# EAGLE board BMS Test Board rev1 r2 (EAGLE 9.2.2), part 1 of 4
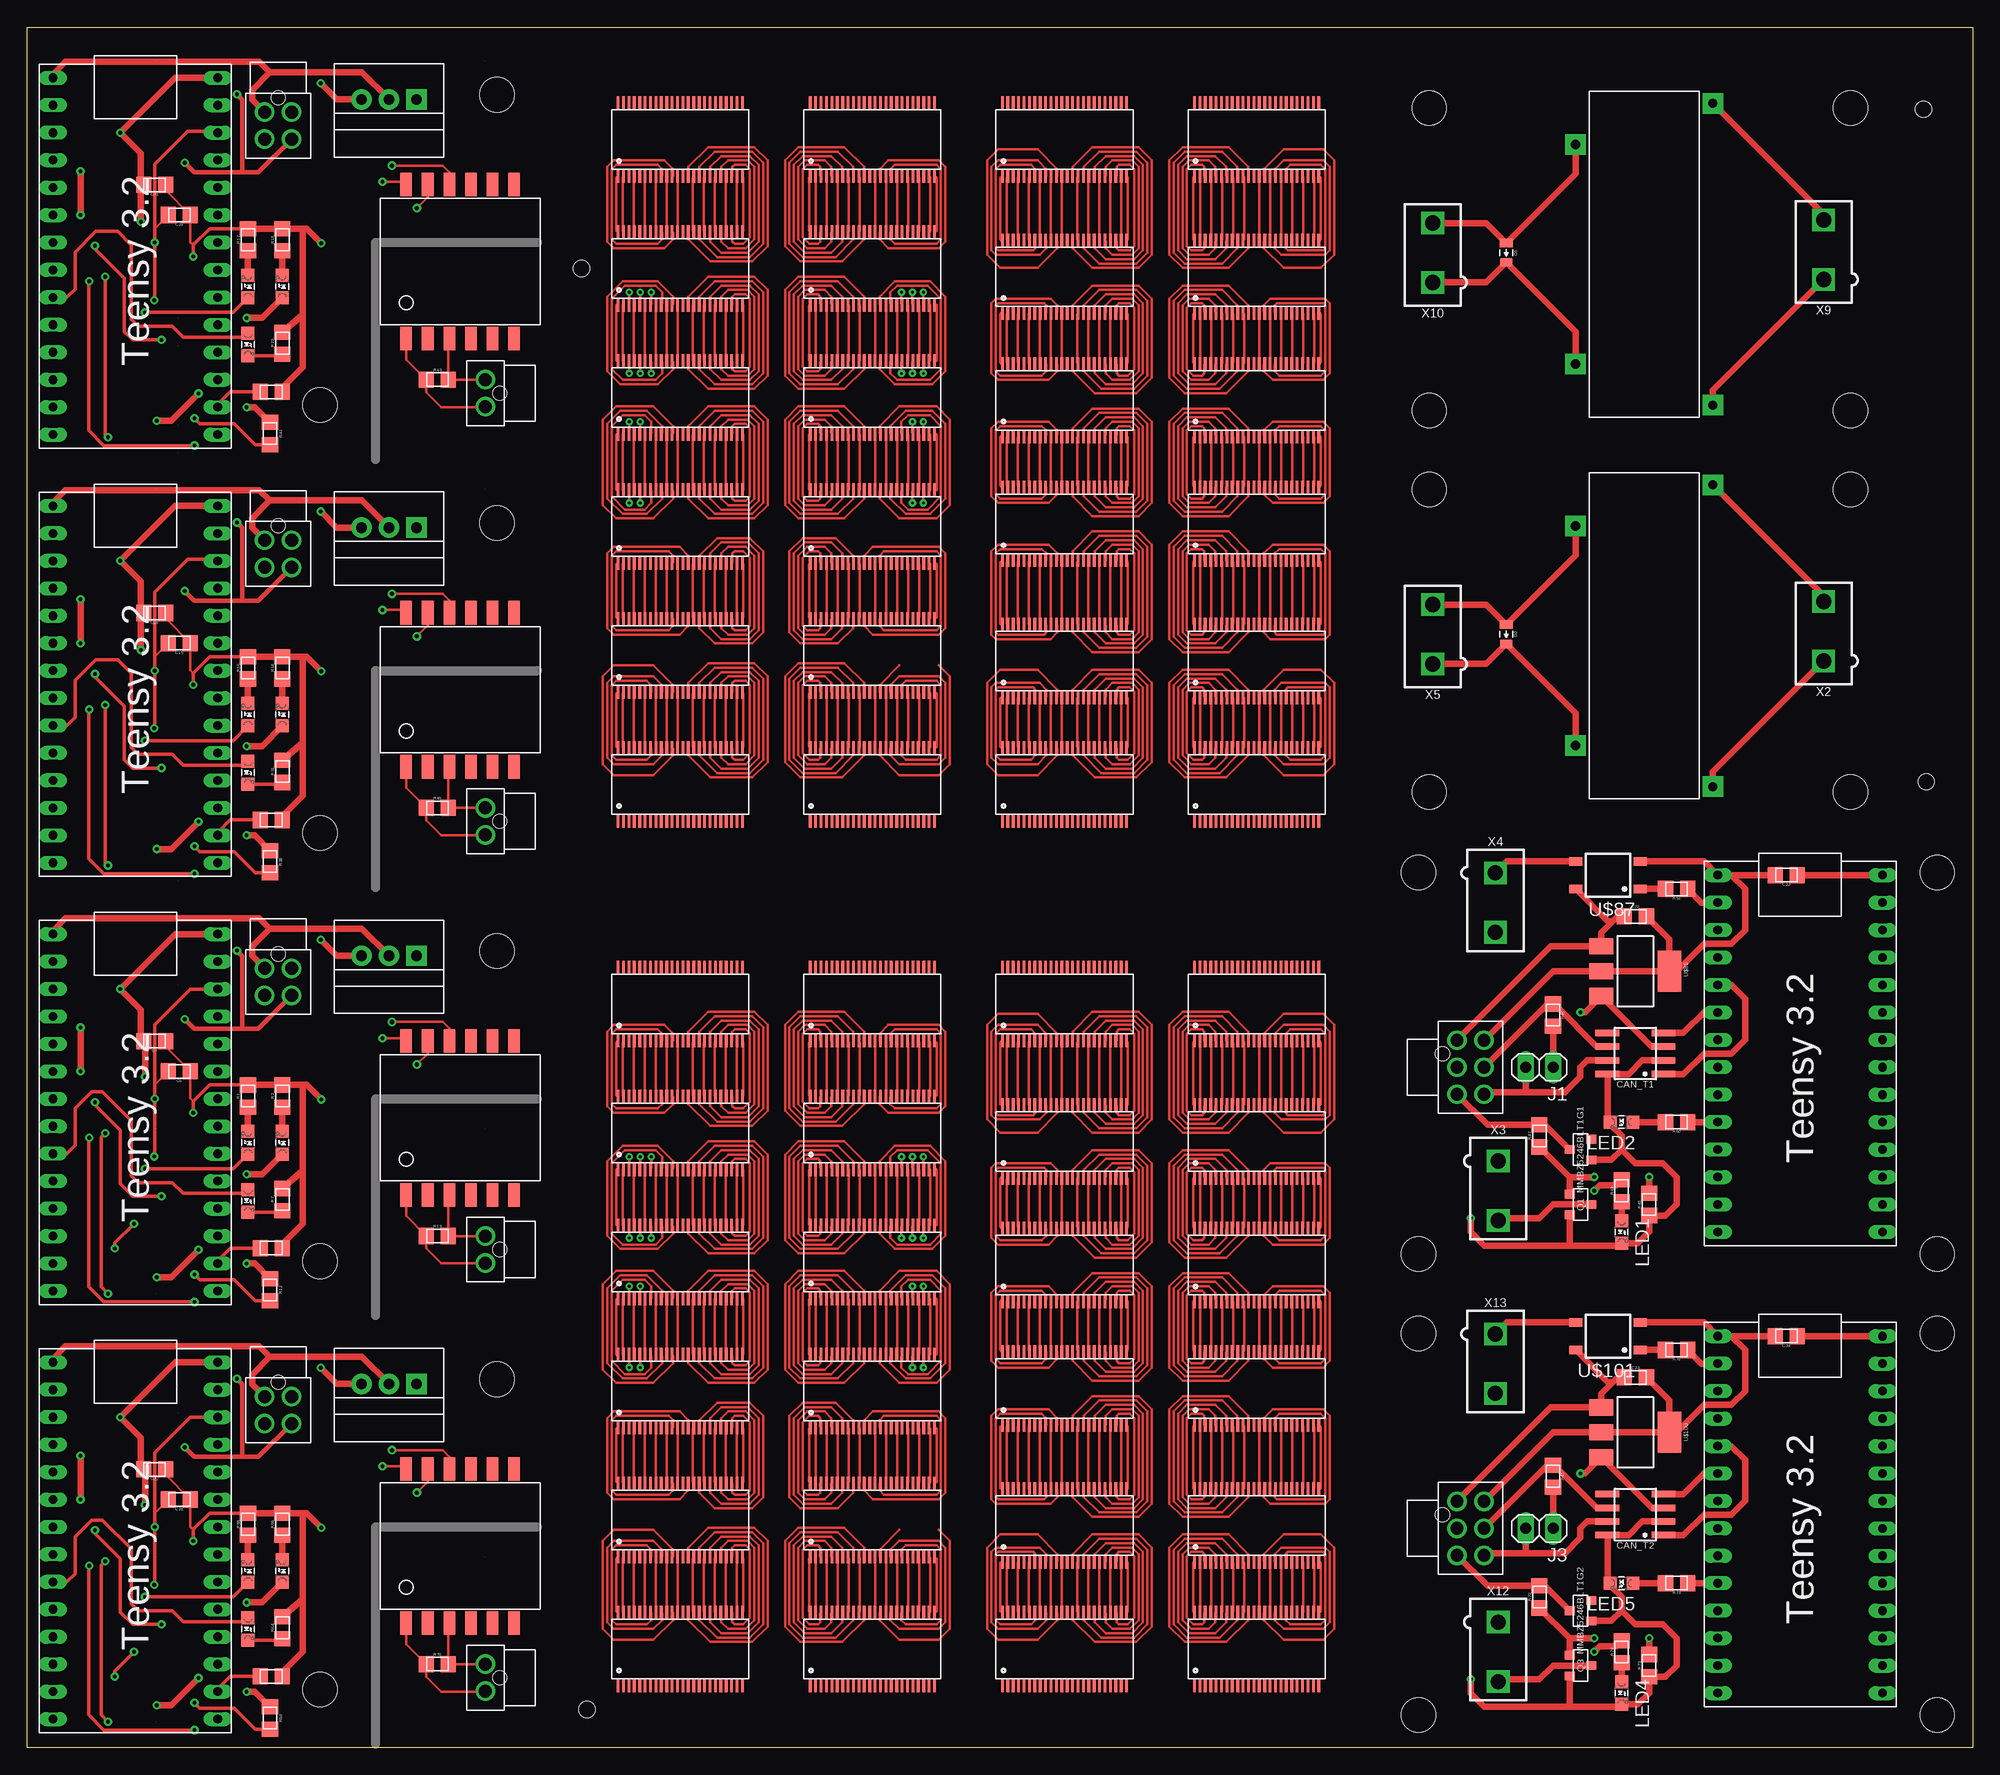
[diagram p0: board, top side]
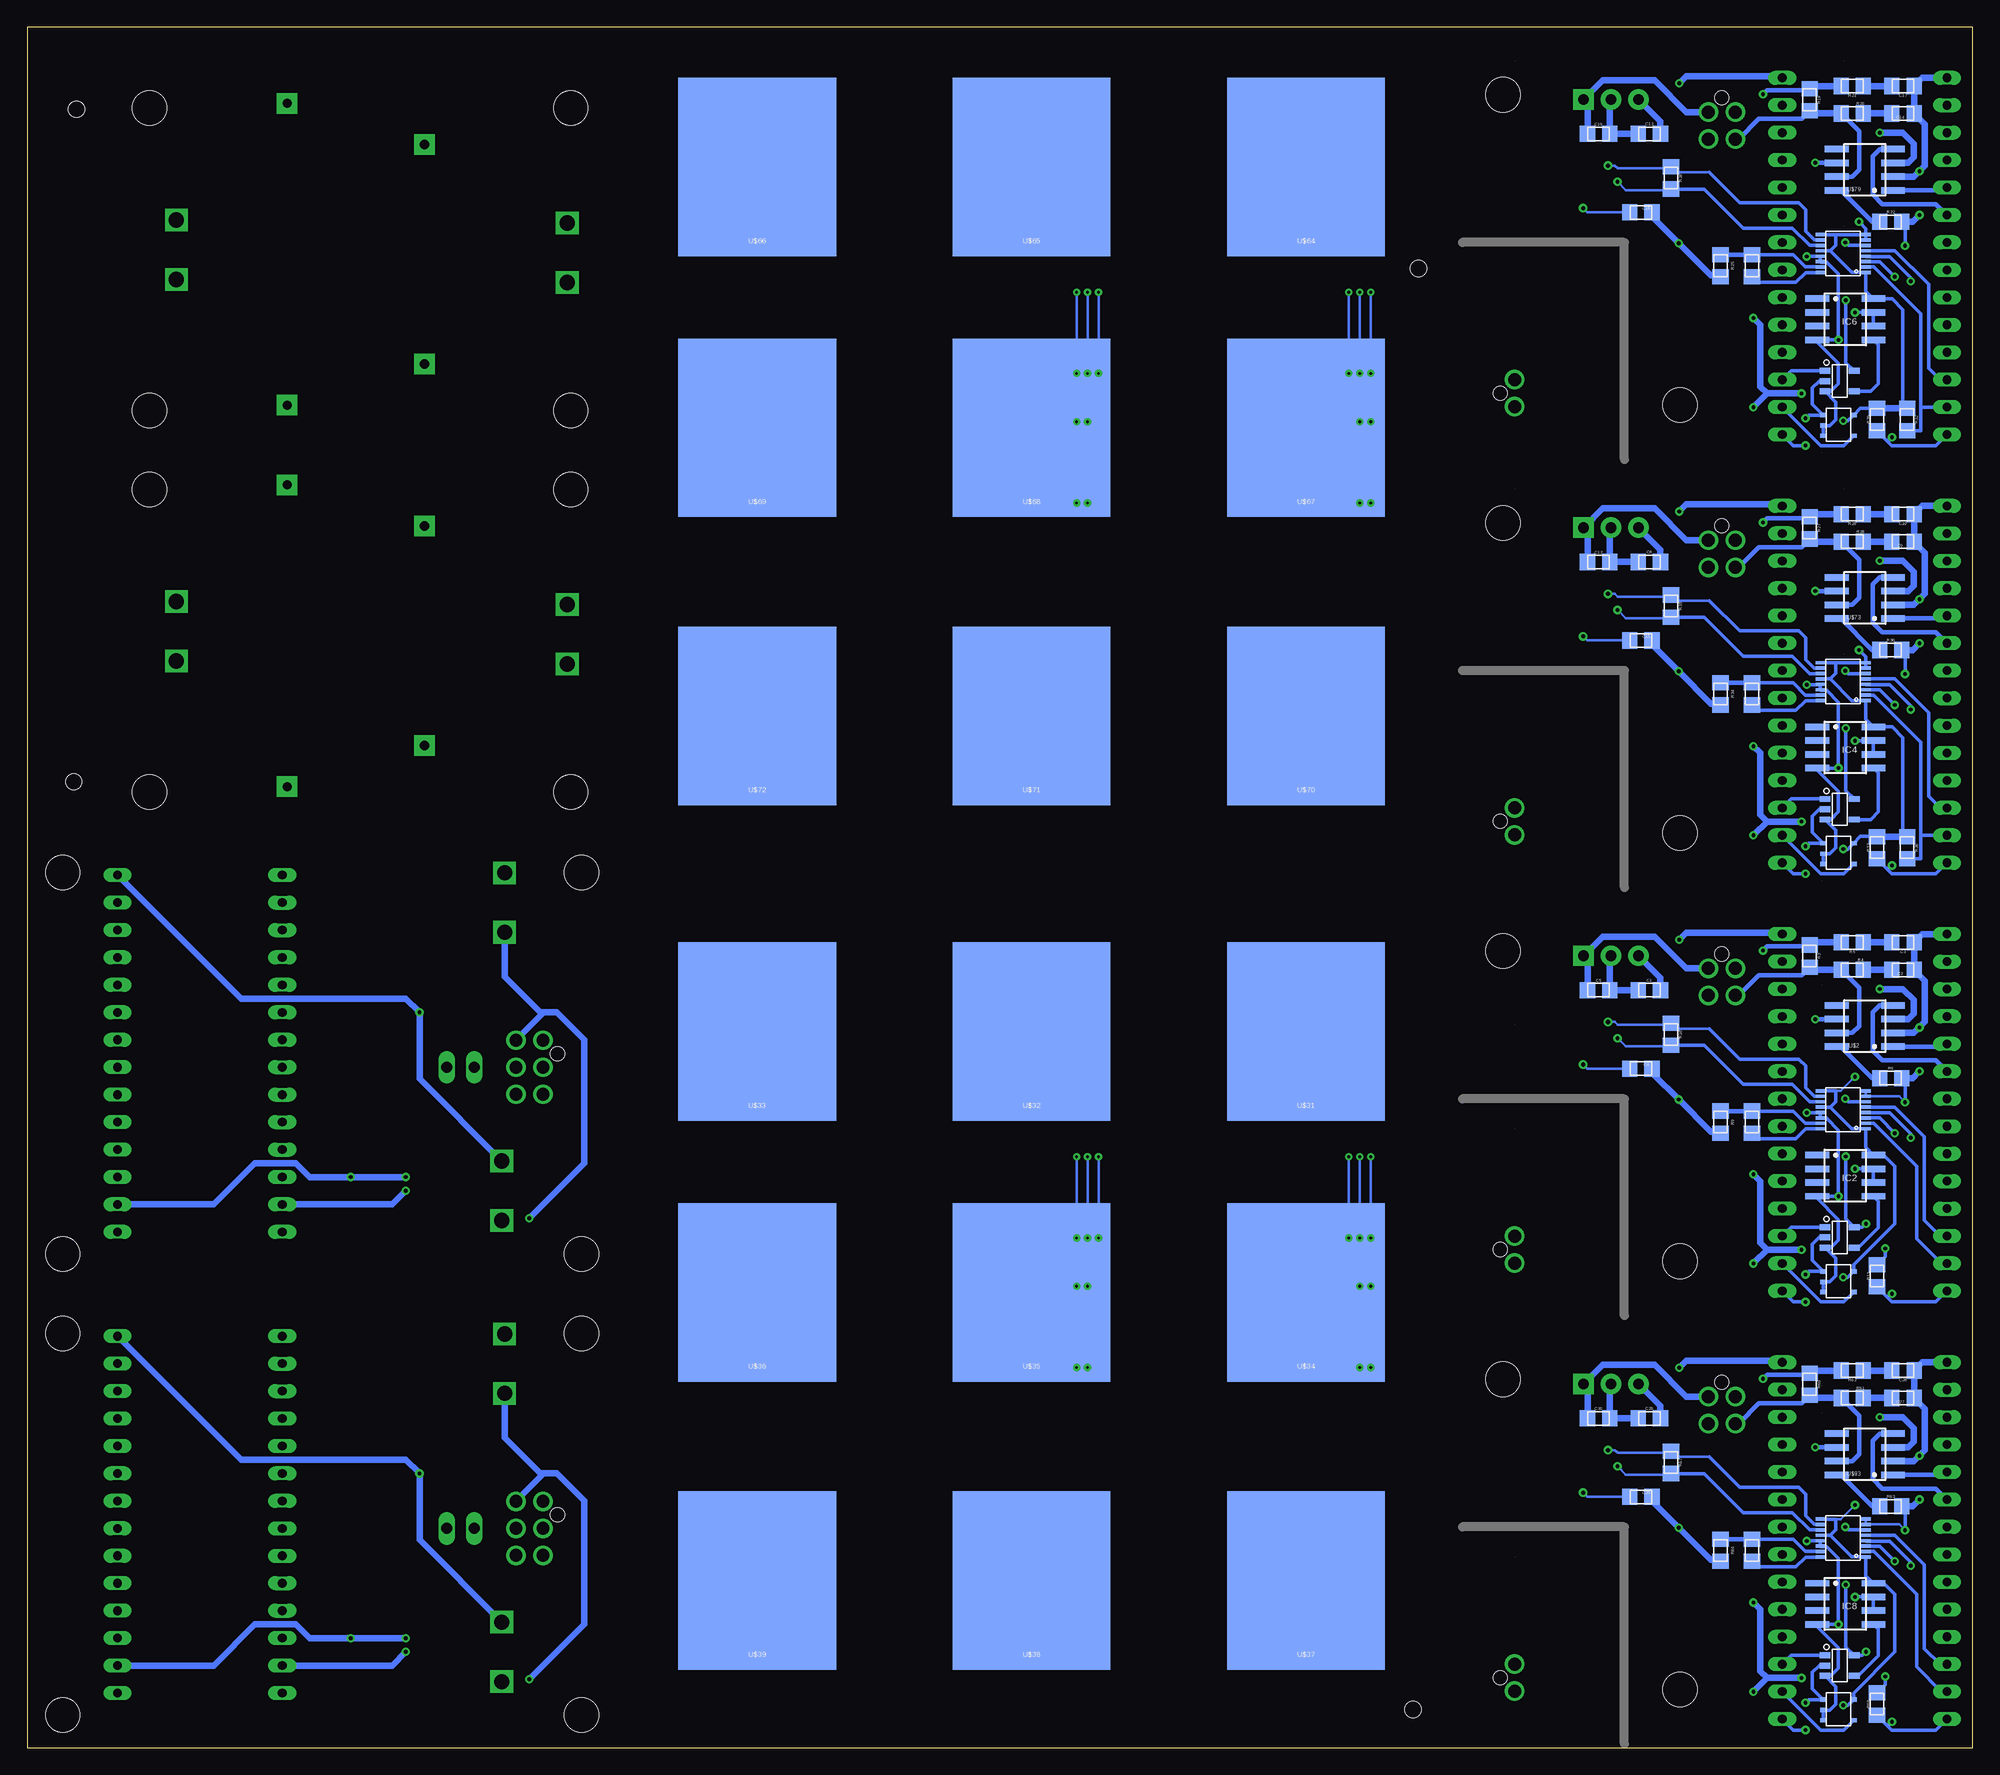
[diagram p1: board, bottom side, seen from below]

Size 180.09 x 159.26 mm. Coordinates in mm from the lower left corner, seen from the top.
Outline: 0,159.26 180.09,159.26 180.09,0 0,0 0,159.26
Copper layers (1*16): Top 0.035mm / dielectric 1.5mm / Bottom 0.035mm
Design rules "default": minimum track width 6mil, minimum drill 0.35mm, track to track 6mil, track to pad 6mil, pad to pad 6mil, via to via 6mil, smd to smd 6mil, copper to edge 40mil, drill to drill 6mil, minimum pad ring 10mil, minimum via ring 8mil, stop-mask expansion 4mil, vias tented up to drill 0mil, thermal gap 10mil
Net classes: 2 ISO_SPI: clearance 8.5 mm to class 0, clearance 8.5 mm to class 1
Holes 3.17 mm at 129.76,116.47 129.76,88.47 168.77,88.47 168.77,116.47 129.76,151.78 129.76,123.78 168.77,123.78 168.77,151.78 128.78,38.35 128.78,3.05 176.78,3.05 176.78,38.35 128.78,81.03 128.78,45.72 176.78,45.72 176.78,81.03
Holes 3.2 mm at 27.1,5.41 43.48,34.11 27.1,45.03 43.48,73.74 27.1,84.66 43.48,113.36 27.1,124.28 43.48,152.98
Holes 1.5 mm at 175.51,151.64 175.77,89.41 51.31,136.91 51.82,3.56

## Footprints (pad centres in the part's own frame; a part is rotated, then mirrored left to right if it is on the bottom)
LED-805 = smd 1.2 x 1.2: A 0,-1.05; C 0,1.05
0805 = smd 1.4 x 1.5: 1 -1.025,0; 2 1.025,0
SOIC-08 = smd 0.6 x 2.2: 1 -1.905,-2.6; 2 -0.635,-2.6; 3 0.635,-2.6; 4 1.905,-2.6; 5 1.905,2.6; 6 0.635,2.6; 7 -0.635,2.6; 8 -1.905,2.6
0805_D = smd 0.8 x 1.2: A -0.9,0; C 0.9,0
OKI-78SR = drill 1 pad 1.88 square: 1 -2.54,0 | drill 1 pad 1.88: 2 0,0; 3 2.54,0
NANO-FIT_VERTICAL-2 = drill 1.2: P$1 -1.25,0; P$2 1.25,0 | hole 1.3: 0,-1.34
1X02 = drill 1.016 long: 1 -1.27,0; 2 1.27,0
SOT23 = smd 0.8 x 0.9: 1 -0.95,-1; 2 0.95,-1; 3 0,1
NANO-FIT_VERTICAL-4 = drill 1.2: P$1 -1.25,0; P$2 1.25,0; P$3 -1.25,2.5; P$4 1.25,2.5 | hole 1.3: 0,-1.34
LTC6804 = smd 0.25 x 1.25: 1 -5.75,-3.37; 2 -5.25,-3.37; 3 -4.75,-3.37; 4 -4.25,-3.37; 5 -3.75,-3.37; 6 -3.25,-3.37; 7 -2.75,-3.37; 8 -2.25,-3.37; 9 -1.75,-3.37; 10 -1.25,-3.37; 11 -0.75,-3.37; 12 -0.25,-3.37; 13 0.25,-3.37; 14 0.75,-3.37; 15 1.25,-3.37; 16 1.75,-3.37; 17 2.25,-3.37; 18 2.75,-3.37; 19 3.25,-3.37; 20 3.75,-3.37; 21 4.25,-3.37; 22 4.75,-3.37; 23 5.25,-3.37; 24 5.75,-3.37; 25 5.75,3.38; 26 5.25,3.38; 27 4.75,3.38; 28 4.25,3.38; 29 3.75,3.38; 30 3.25,3.38; 31 2.75,3.38; 32 2.25,3.38; 33 1.75,3.38; 34 1.25,3.38; 35 0.75,3.38; 36 0.25,3.38; 37 -0.25,3.38; 38 -0.75,3.38; 39 -1.25,3.38; 40 -1.75,3.38; 41 -2.25,3.38; 42 -2.75,3.38; 43 -3.25,3.38; 44 -3.75,3.38; 45 -4.25,3.38; 46 -4.75,3.38; 47 -5.25,3.38; 48 -5.75,3.38
MSOP-16 = smd 0.305 x 0.889: 1 -0.1,-0.5; 2 0.4,-0.5; 3 0.9,-0.5; 4 1.4,-0.5; 5 1.9,-0.5; 6 2.4,-0.5; 7 2.9,-0.5; 8 3.4,-0.5; 9 3.4,3.7; 10 2.9,3.7; 11 2.4,3.7; 12 1.9,3.7; 13 1.4,3.7; 14 0.9,3.7; 15 0.4,3.7; 16 -0.1,3.7
TEENSY_3.2_SIMPLE = drill 0.8 long: 3.3V 16.51,29.21; A0 16.51,3.81; A1 16.51,6.35; A2 16.51,8.89; A3 16.51,11.43; A4 16.51,13.97; A5 16.51,16.51; A6 16.51,19.05; A7 16.51,21.59; A8 16.51,24.13; A9 16.51,26.67; AGND 16.51,31.75; D0(RX1) 1.27,31.75; D1(TX1) 1.27,29.21; D2 1.27,26.67; D3(CANTX) 1.27,24.13; D4(CANRX) 1.27,21.59; D5 1.27,19.05; D6 1.27,16.51; D7(RX3) 1.27,13.97; D8(TX3) 1.27,11.43; D9(RX2) 1.27,8.89; D10(TX2) 1.27,6.35; D11 1.27,3.81; D12 1.27,1.27; D13 16.51,1.27; GND 1.27,34.29; VIN 16.51,34.29
SOT23-5 = smd 0.61 x 0.406: EN -2.794,0; GND -2.794,0.94; VCC 0,1.905; WDI 0,0; WDO -2.794,1.905
HM2102NLT = smd 1.067 x 2.184: P$1 0,0; P$2 2,0; P$3 4,0; P$4 6,0; P$5 8,0; P$6 10,0; P$7 10,14.25; P$8 8,14.25; P$9 6,14.25; P$10 4,14.25; P$11 2,14.25; P$12 0,14.25
SOT-23-5 = smd 1 x 0.55: 1 -1.35,0.95; 2 -1.35,0; 3 -1.35,-0.95; 4 1.35,-0.95; 5 1.35,0.95
KEYSTONE5222 = smd 14.605 x 16.51: P$1 0,0
SOT223 = smd 1.5 x 2.235: 1 -2.3,-3.15; 2 0,-3.15; 3 2.3,-3.15 | smd 3.8 x 2.2: 4 0,3.15
SOP04 = smd 0.8 x 1.2: 1 -1.27,-3; 2 1.27,-3; 3 1.27,3; 4 -1.27,3
KT12-1A-40L-THT = drill 0.85 pad 1.9 square: C1 4.95,11.45; C2 25.25,11.45; S1 1.13,-1.25; S2 29.07,-1.25
NANO-FIT_VERTICAL-6 = drill 1.2: P$1 -2.5,0; P$2 0,0; P$3 2.5,0; P$4 -2.5,2.5; P$5 0,2.5; P$6 2.5,2.5 | hole 1.3: -1.25,-1.34
MINIFIT_5566-2 = drill 1.4 square: 1 0,-2.75; 2 0,2.75

## Placement (x,y rotation side)
BMS-OK  GREEN  [LED-805]  20.45,95.63 0 top
BMS-OK1  GREEN  [LED-805]  20.45,56.01 0 top
BMS-OK2  GREEN  [LED-805]  20.45,135.25 0 top
BMS-OK3  GREEN  [LED-805]  20.45,16.38 0 top
C1  10uF  [0805]  29.95,70.13 180 bottom
C2  560pF  [0805]  6.48,72.01 180 bottom
C3  560pF  [0805]  6.48,74.55 180 bottom
C4  27pF  [0805]  30.73,62.87 0 bottom
C5  10uF  [0805]  34.65,70.13 0 bottom
C6  0.1uF  [0805]  14.1,62.61 180 top
C7  0.1uF  [0805]  11.81,65.41 180 top
C8  10uF  [0805]  29.95,109.75 180 bottom
C9  560pF  [0805]  6.48,111.63 180 bottom
C10  560pF  [0805]  6.48,114.17 180 bottom
C11  27pF  [0805]  30.73,102.49 0 bottom
C12  10uF  [0805]  34.65,109.75 0 bottom
C13  10uF  [0805]  29.95,149.38 180 bottom
C14  560pF  [0805]  6.48,151.26 180 bottom
C15  0.1uF  [0805]  14.1,102.23 180 top
C16  0.1uF  [0805]  11.81,105.03 180 top
C17  560pF  [0805]  6.48,153.8 180 bottom
C18  27pF  [0805]  30.73,142.11 0 bottom
C19  10uF  [0805]  34.65,149.38 0 bottom
C20  0.1uF  [0805]  14.1,141.86 180 top
C21  0.1uF  [0805]  11.81,144.65 180 top
C22  0.22uF  [0805]  148.84,76.96 0 top
C23  0.22uF  [0805]  162.81,80.77 180 top
C26  10uF  [0805]  29.95,30.51 180 bottom
C27  560pF  [0805]  6.48,32.38 180 bottom
C28  560pF  [0805]  6.48,34.92 180 bottom
C29  27pF  [0805]  30.73,23.24 0 bottom
C30  10uF  [0805]  34.65,30.51 0 bottom
C31  0.1uF  [0805]  14.1,22.99 180 top
C32  0.1uF  [0805]  11.81,25.78 180 top
C33  0.22uF  [0805]  148.84,34.29 0 top
C34  0.22uF  [0805]  162.81,38.1 180 top
CAN_T1  MCP2551  [SOIC-08]  148.84,64.26 90 top
CAN_T2  MCP2551  [SOIC-08]  148.84,21.59 90 top
D1  DIODE0805  [0805_D]  136.9,138.37 270 top
D2  DIODE0805  [0805_D]  136.9,103.06 270 top
IC1  OKI-78SR-5  [OKI-78SR]  33.5,73.3 180 top
IC2  NE5532SOIC  [SOIC-08]  11.81,52.96 270 bottom
IC3  OKI-78SR-5  [OKI-78SR]  33.5,112.93 180 top
IC4  NE5532SOIC  [SOIC-08]  11.81,92.58 270 bottom
IC5  OKI-78SR-5  [OKI-78SR]  33.5,152.55 180 top
IC6  NE5532SOIC  [SOIC-08]  11.81,132.21 270 bottom
IC7  OKI-78SR-5  [OKI-78SR]  33.5,33.68 180 top
IC8  NE5532SOIC  [SOIC-08]  11.81,13.34 270 bottom
ISO_SPI  ISO_SPI  [NANO-FIT_VERTICAL-2]  42.42,85.75 90 top
ISO_SPI1  ISO_SPI  [NANO-FIT_VERTICAL-2]  42.42,46.12 90 top
ISO_SPI2  ISO_SPI  [NANO-FIT_VERTICAL-2]  42.42,125.37 90 top
ISO_SPI3  ISO_SPI  [NANO-FIT_VERTICAL-2]  42.42,6.5 90 top
J1  JUMPER.1  [1X02]  139.95,62.99 180 top
J3  JUMPER.1  [1X02]  139.95,20.32 180 top
LED1  [LED-805]  147.57,47.75 180 top
LED2  [LED-805]  147.57,57.91 90 top
LED4  [LED-805]  147.57,5.08 180 top
LED5  [LED-805]  147.57,15.24 90 top
MMBZ5246BLT1G1  DIODE_ZENER  [SOT23]  143.76,55.37 90 top
MMBZ5246BLT1G2  DIODE_ZENER  [SOT23]  143.76,12.7 90 top
ON-LED  PURPLE  [LED-805]  23.62,95.63 0 top
ON-LED1  PURPLE  [LED-805]  23.62,56.01 0 top
ON-LED2  PURPLE  [LED-805]  23.62,135.25 0 top
ON-LED3  PURPLE  [LED-805]  23.62,16.38 0 top
POWER  POWER  [NANO-FIT_VERTICAL-4]  23.24,111.76 180 top
POWER1  POWER  [NANO-FIT_VERTICAL-4]  23.24,72.14 180 top
POWER2  POWER  [NANO-FIT_VERTICAL-4]  23.24,151.38 180 top
POWER3  POWER  [NANO-FIT_VERTICAL-4]  23.24,32.51 180 top
Q1  [SOT23]  143.76,50.29 270 top
Q3  [SOT23]  143.76,7.62 270 top
R1  820  [0805]  20.45,60.33 90 top
R2  270  [0805]  23.62,60.33 90 top
R3  120  [0805]  15.11,73.28 270 bottom
R4  100  [0805]  11.18,72.01 180 bottom
R5  100  [0805]  11.18,74.55 180 bottom
R6  1k  [0805]  7.62,61.98 180 bottom
R7  430  [0805]  23.62,50.75 90 top
R8  1k  [0805]  20.45,57.91 90 bottom
R9  1k  [0805]  23.37,57.91 270 bottom
R10  120  [0805]  27.94,66.04 270 bottom
R11  2k  [0805]  8.89,43.69 270 bottom
R12  430  [0805]  22.48,42.39 270 top
R13  100  [0805]  37.97,47.37 0 top
R14  10k  [0805]  22.61,46.25 0 top
R15  820  [0805]  20.45,99.95 90 top
R16  270  [0805]  23.62,99.95 90 top
R17  820  [0805]  20.45,139.57 90 top
R18  270  [0805]  23.62,139.57 90 top
R19  120  [0805]  15.11,152.53 270 bottom
R20  100  [0805]  11.18,151.26 180 bottom
R21  100  [0805]  11.18,153.8 180 bottom
R22  1k  [0805]  7.62,141.22 180 bottom
R23  430  [0805]  23.62,130 90 top
R24  1k  [0805]  20.45,137.16 90 bottom
R25  1k  [0805]  23.37,137.16 270 bottom
R26  120  [0805]  27.94,145.29 270 bottom
R27  120  [0805]  15.11,112.9 270 bottom
R28  100  [0805]  11.18,111.63 180 bottom
R29  100  [0805]  11.18,114.17 180 bottom
R30  1k  [0805]  7.62,101.6 180 bottom
R31  430  [0805]  23.62,90.37 90 top
R32  2k  [0805]  6.1,122.94 270 bottom
R33  1k  [0805]  20.45,97.54 90 bottom
R34  1k  [0805]  23.37,97.54 270 bottom
R35  120  [0805]  27.94,105.66 270 bottom
R36  2k  [0805]  6.1,83.31 270 bottom
R37  2k  [0805]  8.89,83.31 270 bottom
R38  430  [0805]  22.48,82.02 270 top
R39  2k  [0805]  8.89,122.94 270 bottom
R40  100  [0805]  37.97,87 0 top
R41  430  [0805]  22.48,121.64 270 top
R42  10k  [0805]  22.61,85.88 0 top
R43  100  [0805]  37.97,126.62 0 top
R44  10k  [0805]  22.61,125.5 0 top
R45  120  [0805]  141.22,25.15 270 top
R46  120  [0805]  141.22,67.82 270 top
R47  20k  [0805]  139.95,56.64 90 top
R48  10k  [0805]  150.11,50.29 90 top
R49  1.2k  [0805]  147.57,51.56 90 top
R50  1.2k  [0805]  152.65,57.91 180 top
R51  330  [0805]  152.65,79.5 180 top
R58  820  [0805]  20.45,20.7 90 top
R59  270  [0805]  23.62,20.7 90 top
R60  120  [0805]  15.11,33.66 270 bottom
R61  100  [0805]  11.18,32.38 180 bottom
R62  100  [0805]  11.18,34.92 180 bottom
R63  1k  [0805]  7.62,22.35 180 bottom
R64  430  [0805]  23.62,11.13 90 top
R65  1k  [0805]  20.45,18.29 90 bottom
R66  1k  [0805]  23.37,18.29 270 bottom
R67  120  [0805]  27.94,26.42 270 bottom
R68  2k  [0805]  8.89,4.06 270 bottom
R69  430  [0805]  22.48,2.77 270 top
R70  100  [0805]  37.97,7.75 0 top
R71  10k  [0805]  22.61,6.63 0 top
R72  20k  [0805]  139.95,13.97 90 top
R73  10k  [0805]  150.11,7.62 90 top
R74  1.2k  [0805]  147.57,8.89 90 top
R75  1.2k  [0805]  152.65,15.24 180 top
R76  330  [0805]  152.65,36.83 180 top
TEENSY  BLUE  [LED-805]  20.45,90.25 180 top
TEENSY1  BLUE  [LED-805]  20.45,50.62 180 top
TEENSY2  BLUE  [LED-805]  20.45,129.87 180 top
TEENSY3  BLUE  [LED-805]  20.45,11 180 top
U$1  LTC6804-2  [LTC6804]  60.45,9.14 0 top
U$2  MCP2551  [SOIC-08]  10.01,66.8 90 bottom
U$3  LTC6820  [MSOP-16]  10.41,57.4 90 bottom
U$4  LTC6804-2  [LTC6804]  60.45,21.08 0 top
U$5  LTC6804-2  [LTC6804]  60.45,33.02 0 top
U$6  LTC6804-2  [LTC6804]  60.45,44.96 0 top
U$7  TEENSY_3.2_SIMPLE  [TEENSY_3.2_SIMPLE]  1.14,41.02 0 top
U$8  STWD100  [SOT23-5]  11.05,42.19 0 bottom
U$9  HM2102NLT  [HM2102NLT]  35.09,51.18 0 top
U$10  SN74LVC1G08  [SOT-23-5]  12.34,47.24 0 bottom
U$11  LTC6804-2  [LTC6804]  60.45,56.9 0 top
U$12  LTC6804-2  [LTC6804]  60.45,68.83 0 top
U$13  LTC6804-2  [LTC6804]  78.23,9.14 0 top
U$14  LTC6804-2  [LTC6804]  78.23,21.08 0 top
U$15  LTC6804-2  [LTC6804]  78.23,33.02 0 top
U$16  LTC6804-2  [LTC6804]  78.23,44.96 0 top
U$17  LTC6804-2  [LTC6804]  78.23,56.9 0 top
U$18  LTC6804-2  [LTC6804]  78.23,68.83 0 top
U$19  LTC6804-2  [LTC6804]  96.01,9.14 0 top
U$20  LTC6804-2  [LTC6804]  96.01,20.57 0 top
U$21  LTC6804-2  [LTC6804]  96.01,33.27 0 top
U$22  LTC6804-2  [LTC6804]  96.01,44.7 0 top
U$23  LTC6804-2  [LTC6804]  96.01,56.13 0 top
U$24  LTC6804-2  [LTC6804]  96.01,68.83 0 top
U$25  LTC6804-2  [LTC6804]  113.79,9.14 0 top
U$26  LTC6804-2  [LTC6804]  113.79,20.57 0 top
U$27  LTC6804-2  [LTC6804]  113.79,33.27 0 top
U$28  LTC6804-2  [LTC6804]  113.79,44.7 0 top
U$29  LTC6804-2  [LTC6804]  113.79,56.13 0 top
U$30  LTC6804-2  [LTC6804]  113.79,68.83 0 top
U$31  BATTERY_SPRING_KEYSTONE5222  [KEYSTONE5222]  61.72,66.29 0 bottom
U$32  BATTERY_SPRING_KEYSTONE5222  [KEYSTONE5222]  87.12,66.29 0 bottom
U$33  BATTERY_SPRING_KEYSTONE5222  [KEYSTONE5222]  112.52,66.29 0 bottom
U$34  BATTERY_SPRING_KEYSTONE5222  [KEYSTONE5222]  61.72,42.16 0 bottom
U$35  BATTERY_SPRING_KEYSTONE5222  [KEYSTONE5222]  87.12,42.16 0 bottom
U$36  BATTERY_SPRING_KEYSTONE5222  [KEYSTONE5222]  112.52,42.16 0 bottom
U$37  BATTERY_SPRING_KEYSTONE5222  [KEYSTONE5222]  61.72,15.49 0 bottom
U$38  BATTERY_SPRING_KEYSTONE5222  [KEYSTONE5222]  87.12,15.49 0 bottom
U$39  BATTERY_SPRING_KEYSTONE5222  [KEYSTONE5222]  112.52,15.49 0 bottom
U$40  LTC6804-2  [LTC6804]  60.45,89.15 0 top
U$41  LTC6804-2  [LTC6804]  60.45,101.09 0 top
U$42  LTC6804-2  [LTC6804]  60.45,113.03 0 top
U$43  LTC6804-2  [LTC6804]  60.45,124.97 0 top
U$44  LTC6804-2  [LTC6804]  60.45,136.91 0 top
U$45  LTC6804-2  [LTC6804]  60.45,148.84 0 top
U$46  LTC6804-2  [LTC6804]  78.23,89.15 0 top
U$47  LTC6804-2  [LTC6804]  78.23,101.09 0 top
U$48  LTC6804-2  [LTC6804]  78.23,113.03 0 top
U$49  LTC6804-2  [LTC6804]  78.23,124.97 0 top
U$50  LTC6804-2  [LTC6804]  78.23,136.91 0 top
U$51  LTC6804-2  [LTC6804]  78.23,148.84 0 top
U$52  LTC6804-2  [LTC6804]  96.01,89.15 0 top
U$53  LTC6804-2  [LTC6804]  96.01,100.58 0 top
U$54  LTC6804-2  [LTC6804]  96.01,113.28 0 top
U$55  LTC6804-2  [LTC6804]  96.01,124.71 0 top
U$56  LTC6804-2  [LTC6804]  96.01,136.14 0 top
U$57  LTC6804-2  [LTC6804]  96.01,148.84 0 top
U$58  LTC6804-2  [LTC6804]  113.79,89.15 0 top
U$59  LTC6804-2  [LTC6804]  113.79,100.58 0 top
U$60  LTC6804-2  [LTC6804]  113.79,113.28 0 top
U$61  LTC6804-2  [LTC6804]  113.79,124.71 0 top
U$62  LTC6804-2  [LTC6804]  113.79,136.14 0 top
U$63  LTC6804-2  [LTC6804]  113.79,148.84 0 top
U$64  BATTERY_SPRING_KEYSTONE5222  [KEYSTONE5222]  61.72,146.3 0 bottom
U$65  BATTERY_SPRING_KEYSTONE5222  [KEYSTONE5222]  87.12,146.3 0 bottom
U$66  BATTERY_SPRING_KEYSTONE5222  [KEYSTONE5222]  112.52,146.3 0 bottom
U$67  BATTERY_SPRING_KEYSTONE5222  [KEYSTONE5222]  61.72,122.17 0 bottom
U$68  BATTERY_SPRING_KEYSTONE5222  [KEYSTONE5222]  87.12,122.17 0 bottom
U$69  BATTERY_SPRING_KEYSTONE5222  [KEYSTONE5222]  112.52,122.17 0 bottom
U$70  BATTERY_SPRING_KEYSTONE5222  [KEYSTONE5222]  61.72,95.5 0 bottom
U$71  BATTERY_SPRING_KEYSTONE5222  [KEYSTONE5222]  87.12,95.5 0 bottom
U$72  BATTERY_SPRING_KEYSTONE5222  [KEYSTONE5222]  112.52,95.5 0 bottom
U$73  MCP2551  [SOIC-08]  10.01,106.43 90 bottom
U$74  LTC6820  [MSOP-16]  10.41,97.03 90 bottom
U$75  TEENSY_3.2_SIMPLE  [TEENSY_3.2_SIMPLE]  1.14,80.64 0 top
U$76  STWD100  [SOT23-5]  11.05,81.81 0 bottom
U$77  HM2102NLT  [HM2102NLT]  35.09,90.81 0 top
U$78  SN74LVC1G08  [SOT-23-5]  12.34,86.87 0 bottom
U$79  MCP2551  [SOIC-08]  10.01,146.05 90 bottom
U$80  LTC6820  [MSOP-16]  10.41,136.65 90 bottom
U$81  TEENSY_3.2_SIMPLE  [TEENSY_3.2_SIMPLE]  1.14,120.27 0 top
U$82  STWD100  [SOT23-5]  11.05,121.44 0 bottom
U$83  HM2102NLT  [HM2102NLT]  35.09,130.43 0 top
U$84  SN74LVC1G08  [SOT-23-5]  12.34,126.49 0 bottom
U$85  TEENSY_3.2_SIMPLE  [TEENSY_3.2_SIMPLE]  155.19,46.48 0 top
U$86  [SOT223]  148.84,71.88 270 top
U$87  CPC1002N  [SOP04]  146.3,80.77 90 top
U$88  KT12-1A-40L-THT  [KT12-1A-40L-THT]  154.75,87.82 90 top
U$92  KT12-1A-40L-THT  [KT12-1A-40L-THT]  154.75,123.13 90 top
U$93  MCP2551  [SOIC-08]  10.01,27.18 90 bottom
U$94  LTC6820  [MSOP-16]  10.41,17.78 90 bottom
U$95  TEENSY_3.2_SIMPLE  [TEENSY_3.2_SIMPLE]  1.14,1.4 0 top
U$96  STWD100  [SOT23-5]  11.05,2.57 0 bottom
U$97  HM2102NLT  [HM2102NLT]  35.09,11.56 0 top
U$98  SN74LVC1G08  [SOT-23-5]  12.34,7.62 0 bottom
U$99  TEENSY_3.2_SIMPLE  [TEENSY_3.2_SIMPLE]  155.19,3.81 0 top
U$100  [SOT223]  148.84,29.21 270 top
U$101  CPC1002N  [SOP04]  146.3,38.1 90 top
X1  CONNECTOR-6NANO-FIT_VERTICAL-6  [NANO-FIT_VERTICAL-6]  132.33,62.99 270 top
X2  CONNECTOR-2  [MINIFIT_5566-2]  166.27,103.34 0 top
X3  CONNECTOR-2  [MINIFIT_5566-2]  136.14,51.56 180 top
X4  CONNECTOR-2  [MINIFIT_5566-2]  135.89,78.23 180 top
X5  CONNECTOR-2  [MINIFIT_5566-2]  130.09,103.06 0 top
X9  CONNECTOR-2  [MINIFIT_5566-2]  166.27,138.65 0 top
X10  CONNECTOR-2  [MINIFIT_5566-2]  130.09,138.37 0 top
X11  CONNECTOR-6NANO-FIT_VERTICAL-6  [NANO-FIT_VERTICAL-6]  132.33,20.32 270 top
X12  CONNECTOR-2  [MINIFIT_5566-2]  136.14,8.89 180 top
X13  CONNECTOR-2  [MINIFIT_5566-2]  135.89,35.56 180 top

## Library data of the parts
BMS-OK BMS-OK1-BMS-OK3 C1-C23 C26-C34 CAN_T1 CAN_T2 D1 D2 IC1-IC8 ISO_SPI ISO_SPI1-ISO_SPI3 J1 J3 LED1 LED2 LED4 LED5 MMBZ5246BLT1G1 MMBZ5246BLT1G2 ON-LED ON-LED1-ON-LED3 POWER POWER1-POWER3 Q1 Q3 R1-R51 R58-R76 TEENSY TEENSY1-TEENSY3 U$1-U$88 U$92-U$101 X1 X11 = HyTechDevices
X2-X5 X9 X10 X12 X13 = HyTechDevices; OC_FARNELL: 1822072; OC_NEWARK: unknown

## Nets
5V2: C34.1 CAN_T2.3 U$99.VIN U$100.3 X12.1
5V4: C23.1 CAN_T1.3 U$85.VIN U$86.3 X3.1
12V1: D2.C U$88.C1 X5.1
12V2: C22.1 U$86.1 U$87.4 X1.P$1
12V3: D1.C U$92.C1 X10.1
12V4: C33.1 U$100.1 U$101.4 X11.P$1
+3V1: C6.2 R11.1 U$3.6 U$7.3.3V U$10.5
+3V2: C20.2 U$80.6 U$81.3.3V U$84.5
+3V3: C15.2 U$74.6 U$75.3.3V U$78.5
+3V4: C31.2 R68.1 U$94.6 U$95.3.3V U$98.5
+5V: C8.1 C16.2 IC3.3 IC4.8 ON-LED.A R36.1 R37.1 R38.1 U$73.3 U$74.1 U$74.7 U$74.8 U$74.9 U$74.12 U$75.VIN U$76.VCC
+5V1: C1.1 C7.2 IC1.3 IC2.8 ON-LED1.A R12.1 U$2.3 U$3.1 U$3.9 U$3.12 U$7.VIN U$8.VCC
+5V2: C13.1 C21.2 IC5.3 IC6.8 ON-LED2.A R32.1 R39.1 R41.1 U$79.3 U$80.1 U$80.7 U$80.8 U$80.9 U$80.12 U$81.VIN U$82.VCC
+5V3: C26.1 C32.2 IC7.3 IC8.8 ON-LED3.A R69.1 U$93.3 U$94.1 U$94.9 U$94.12 U$95.VIN U$96.VCC
+12V: C12.1 IC3.1 POWER.P$1
+12V1: C5.1 IC1.1 POWER1.P$1
+12V2: C19.1 IC5.1 POWER2.P$1
+12V3: C30.1 IC7.1 POWER3.P$1
BMS_OK: IC4.5 U$78.4
BMS_OK1: IC2.5 U$10.4
BMS_OK2: IC6.5 U$84.4
BMS_OK3: IC8.5 U$98.4
CANH: POWER.P$4 R27.2 R28.2 U$73.7
CANH1: POWER1.P$4 R3.2 R4.2 U$2.7
CANH2: POWER2.P$4 R19.2 R20.2 U$79.7
CANH3: CAN_T1.7 J1.2 X1.P$6
CANH5: POWER3.P$4 R60.2 R61.2 U$93.7
CANH6: CAN_T2.7 J3.2 X11.P$6
CANL: POWER.P$3 R27.1 R29.2 U$73.6
CANL1: POWER1.P$3 R3.1 R5.2 U$2.6
CANL2: POWER2.P$3 R19.1 R21.2 U$79.6
CANL3: CAN_T1.6 R46.1 X1.P$5
CANL5: POWER3.P$3 R60.1 R62.2 U$93.6
CANL6: CAN_T2.6 R45.1 X11.P$5
CANRX1: CAN_T1.4 U$85.D4(CANRX)
CANRX2: CAN_T2.4 U$99.D4(CANRX)
CANTX1: CAN_T1.1 U$85.D3(CANTX)
CANTX2: CAN_T2.1 U$99.D3(CANTX)
CHARGE_ENABLE1: MMBZ5246BLT1G1.3 R47.2 X1.P$3
CHARGE_ENABLE2: MMBZ5246BLT1G2.3 R72.2 X11.P$3
CHRG_C1: R51.1 U$85.D0(RX1)
CHRG_C2: R76.1 U$99.D0(RX1)
CS_LTC1: U$3.5 U$7.D10(TX2)
CS_LTC2: U$80.5 U$81.D10(TX2)
CS_LTC3: U$94.5 U$95.D10(TX2)
CS_LTC6820: U$74.5 U$75.D10(TX2)
CS_MCP3208_3.3V: U$75.D9(RX2)
CS_MCP3208_3.3V1: U$7.D9(RX2)
CS_MCP3208_3.3V2: U$81.D9(RX2)
CS_MCP3208_3.3V3: U$95.D9(RX2)
GND: C8.2 C9.1 C10.1 C11.2 C12.2 C15.1 C16.1 IC3.2 IC4.4 POWER.P$2 R15.2 R16.2 R30.1 R31.2 R34.2 R42.2 U$73.2 U$74.13 U$74.14 U$75.GND U$76.EN U$76.GND U$78.3
GND1: C1.2 C2.1 C3.1 C4.2 C5.2 C6.1 C7.1 IC1.2 IC2.4 POWER1.P$2 R1.2 R2.2 R6.1 R7.2 R9.2 R14.2 U$2.2 U$3.7 U$3.8 U$3.13 U$3.14 U$7.GND U$8.EN U$8.GND U$10.3
GND2: C13.2 C14.1 C17.1 C18.2 C19.2 C20.1 C21.1 IC5.2 IC6.4 POWER2.P$2 R17.2 R18.2 R22.1 R23.2 R25.2 R44.2 U$79.2 U$80.13 U$80.14 U$81.GND U$82.EN U$82.GND U$84.3
GND3: C22.2 C23.2 CAN_T1.2 CAN_T1.8 LED1.C LED2.C MMBZ5246BLT1G1.1 Q1.2 R48.1 U$85.GND U$86.2 U$86.4 U$87.2 X1.P$4 X4.2
GND4: D2.A U$88.C2 X5.2
GND6: D1.A U$92.C2 X10.2
GND7: C26.2 C27.1 C28.1 C29.2 C30.2 C31.1 C32.1 IC7.2 IC8.4 POWER3.P$2 R58.2 R59.2 R63.1 R64.2 R66.2 R71.2 U$93.2 U$94.7 U$94.8 U$94.13 U$94.14 U$95.GND U$96.EN U$96.GND U$98.3
GND8: C33.2 C34.2 CAN_T2.2 CAN_T2.8 LED4.C LED5.C MMBZ5246BLT1G2.1 Q3.2 R73.1 U$99.GND U$100.2 U$100.4 U$101.2 X11.P$4 X13.2
IM: R35.1 U$74.10 U$77.P$10
IM1: R10.1 U$3.10 U$9.P$10
IM2: R26.1 U$80.10 U$83.P$10
IM3: R67.1 U$94.10 U$97.P$10
IP: R35.2 U$74.11 U$77.P$12
IP1: R10.2 U$3.11 U$9.P$12
IP2: R26.2 U$80.11 U$83.P$12
IP3: R67.2 U$94.11 U$97.P$12
ISOSPI-M [ISO_SPI]: ISO_SPI.P$2 R40.2 U$77.P$3
ISOSPI-M1 [ISO_SPI]: ISO_SPI1.P$2 R13.2 U$9.P$3
ISOSPI-M2 [ISO_SPI]: ISO_SPI2.P$2 R43.2 U$83.P$3
ISOSPI-M3 [ISO_SPI]: ISO_SPI3.P$2 R70.2 U$97.P$3
ISOSPI-P [ISO_SPI]: ISO_SPI.P$1 R40.1 U$77.P$1
ISOSPI-P1 [ISO_SPI]: ISO_SPI1.P$1 R13.1 U$9.P$1
ISOSPI-P2 [ISO_SPI]: ISO_SPI2.P$1 R43.1 U$83.P$1
ISOSPI-P3 [ISO_SPI]: ISO_SPI3.P$1 R70.1 U$97.P$1
MISO: R37.2 U$74.3 U$75.D12
MISO1: R11.2 U$3.3 U$7.D12
MISO2: R39.2 U$80.3 U$81.D12
MISO3: R68.2 U$94.3 U$95.D12
MOSI_TEENSY: R36.2 U$74.2 U$75.D11
MOSI_TEENSY1: U$3.2 U$7.D11
MOSI_TEENSY2: R32.2 U$80.2 U$81.D11
MOSI_TEENSY3: U$94.2 U$95.D11
N$1: U$1.48 U$4.1
N$2: U$1.47 U$4.2
N$4: U$1.46 U$4.3
N$5: U$1.45 U$4.4
N$6: U$1.44 U$4.5
N$7: U$1.43 U$4.6
N$8: U$1.42 U$4.7
N$9: U$1.41 U$4.8
N$10: U$1.40 U$4.9
N$11: U$1.39 U$4.10
N$12: U$1.38 U$4.11
N$13: U$1.37 U$4.12
N$14: U$1.36 U$4.13
N$15: U$1.35 U$4.14
N$16: U$1.34 U$4.15
N$17: U$1.33 U$4.16
N$18: U$1.32 U$4.17
N$19: U$1.31 U$4.18
N$20: U$1.30 U$4.19
N$21: U$1.29 U$4.20
N$22: U$1.28 U$4.21
N$23: U$1.27 U$4.22
N$24: U$1.26 U$4.23
N$25: BMS-OK1.A IC2.6 IC2.7
N$26: BMS-OK1.C R1.1
N$27: ON-LED1.C R2.1
N$28: U$2.1 U$7.D3(CANTX)
N$29: R6.2 U$2.8
N$30: U$1.25 U$4.24
N$31: C2.2 R4.1
N$32: C3.2 R5.1
N$33: U$4.48 U$5.1
N$34: U$4.47 U$5.2
N$35: R7.1 TEENSY1.C
N$36: R8.1 U$3.16
N$37: R8.2 R9.1 U$3.15
N$38: C4.1 U$9.P$11
N$39: U$4.46 U$5.3
N$40: U$2.4 U$7.D4(CANRX)
N$41: U$4.45 U$5.4
N$42: U$4.44 U$5.5
N$43: TEENSY1.A U$7.D7(RX3)
N$44: R12.2 U$8.WDO U$10.2
N$45: U$4.43 U$5.6
N$46: U$4.42 U$5.7
N$47: U$4.41 U$5.8
N$48: U$4.40 U$5.9
N$49: U$4.39 U$5.10
N$50: U$7.A1 U$10.1
N$51: U$4.38 U$5.11
N$52: U$4.37 U$5.12
N$53: U$4.36 U$5.13
N$54: U$4.35 U$5.14
N$55: U$4.34 U$5.15
N$56: U$4.33 U$5.16
N$57: U$4.32 U$5.17
N$58: U$4.31 U$5.18
N$59: U$4.30 U$5.19
N$60: U$4.29 U$5.20
N$61: U$4.28 U$5.21
N$62: U$4.27 U$5.22
N$63: U$4.26 U$5.23
N$64: U$4.25 U$5.24
N$65: U$5.48 U$6.1
N$66: U$5.47 U$6.2
N$67: U$5.46 U$6.3
N$68: U$5.45 U$6.4
N$69: U$5.44 U$6.5
N$70: U$5.43 U$6.6
N$71: U$5.42 U$6.7
N$72: U$5.41 U$6.8
N$73: U$5.40 U$6.9
N$74: U$5.39 U$6.10
N$75: U$5.38 U$6.11
N$76: U$5.37 U$6.12
N$77: U$5.36 U$6.13
N$78: U$5.35 U$6.14
N$79: U$5.34 U$6.15
N$80: U$5.33 U$6.16
N$81: U$5.32 U$6.17
N$82: U$5.31 U$6.18
N$83: U$5.30 U$6.19
N$84: U$5.29 U$6.20
N$85: U$5.28 U$6.21
N$86: U$5.27 U$6.22
N$87: U$5.26 U$6.23
N$88: U$5.25 U$6.24
N$89: U$6.48 U$11.1
N$90: U$6.47 U$11.2
N$91: U$6.46 U$11.3
N$92: U$6.45 U$11.4
N$93: U$6.44 U$11.5
N$94: U$6.43 U$11.6
N$95: U$6.42 U$11.7
N$96: U$6.41 U$11.8
N$97: U$6.40 U$11.9
N$98: U$6.39 U$11.10
N$99: U$6.38 U$11.11
N$100: U$6.37 U$11.12
N$101: U$6.36 U$11.13
N$102: U$6.35 U$11.14
N$103: U$6.34 U$11.15
N$104: U$6.33 U$11.16
N$105: U$6.32 U$11.17
N$106: U$6.31 U$11.18
N$107: U$6.30 U$11.19
N$108: U$6.29 U$11.20
N$109: U$6.28 U$11.21
N$110: U$6.27 U$11.22
N$111: U$6.26 U$11.23
N$112: U$6.25 U$11.24
N$113: U$11.48 U$12.1
N$114: U$11.47 U$12.2
N$115: U$11.46 U$12.3
N$116: U$11.45 U$12.4
N$117: U$11.44 U$12.5
N$118: U$11.43 U$12.6
N$119: U$11.42 U$12.7
N$120: U$11.41 U$12.8
N$121: U$11.40 U$12.9
N$122: U$11.39 U$12.10
N$123: U$11.38 U$12.11
N$124: U$11.37 U$12.12
N$125: U$11.36 U$12.13
N$126: U$11.35 U$12.14
N$127: U$11.34 U$12.15
N$128: U$11.33 U$12.16
N$129: U$11.32 U$12.17
N$130: U$11.31 U$12.18
N$131: U$11.30 U$12.19
N$132: U$11.29 U$12.20
N$133: U$11.28 U$12.21
N$134: U$11.27 U$12.22
N$135: U$11.26 U$12.23
N$136: U$11.25 U$12.24
N$137: U$13.25 U$14.24
N$138: U$13.26 U$14.23
N$139: U$13.27 U$14.22
N$140: U$13.28 U$14.21
N$141: U$13.29 U$14.20
N$142: U$13.30 U$14.19
N$143: U$13.31 U$14.18
N$144: U$13.32 U$14.17
N$145: U$13.33 U$14.16
N$146: U$13.34 U$14.15
N$147: U$13.35 U$14.14
N$148: U$13.36 U$14.13
N$149: U$13.37 U$14.12
N$150: U$13.38 U$14.11
N$151: U$13.39 U$14.10
N$152: U$13.40 U$14.9
N$153: U$13.41 U$14.8
N$154: U$13.42 U$14.7
N$155: U$13.43 U$14.6
N$156: U$13.44 U$14.5
N$157: U$13.45 U$14.4
N$158: U$13.46 U$14.3
N$159: U$13.47 U$14.2
N$160: U$13.48 U$14.1
N$161: U$14.25 U$15.24
N$162: U$14.26 U$15.23
N$163: U$14.27 U$15.22
N$164: U$14.28 U$15.21
N$165: U$14.29 U$15.20
N$166: U$14.30 U$15.19
N$167: U$14.31 U$15.18
N$168: U$14.32 U$15.17
N$169: U$14.33 U$15.16
N$170: U$14.34 U$15.15
N$171: U$14.35 U$15.14
N$172: U$14.36 U$15.13
N$173: U$14.37 U$15.12
N$174: U$14.38 U$15.11
N$175: U$14.39 U$15.10
N$176: U$14.40 U$15.9
N$177: U$14.41 U$15.8
N$178: U$14.42 U$15.7
N$179: U$14.43 U$15.6
N$180: U$14.44 U$15.5
N$181: U$14.45 U$15.4
N$182: U$14.46 U$15.3
N$183: U$14.47 U$15.2
N$184: U$14.48 U$15.1
N$185: U$15.25 U$16.24
N$186: U$15.26 U$16.23
N$187: U$15.27 U$16.22
N$188: U$15.28 U$16.21
N$189: U$15.29 U$16.20
N$190: U$15.30 U$16.19
N$191: U$15.31 U$16.18
N$192: U$15.32 U$16.17
N$193: U$15.33 U$16.16
N$194: U$15.34 U$16.15
N$195: U$15.35 U$16.14
N$196: U$15.36 U$16.13
N$197: U$15.37 U$16.12
N$198: U$15.38 U$16.11
N$199: U$15.39 U$16.10
N$200: U$15.40 U$16.9
N$201: U$15.41 U$16.8
N$202: U$15.42 U$16.7
N$203: U$15.43 U$16.6
N$204: U$15.44 U$16.5
N$205: U$15.45 U$16.4
N$206: U$15.46 U$16.3
N$207: U$15.47 U$16.2
N$208: U$15.48 U$16.1
N$209: U$16.25 U$17.24
N$210: U$16.26 U$17.23
N$211: U$16.27 U$17.22
N$212: U$16.28 U$17.21
N$213: U$16.29 U$17.20
N$214: U$16.30 U$17.19
N$215: U$16.31 U$17.18
N$216: U$16.32 U$17.17
N$217: U$16.33 U$17.16
N$218: U$16.34 U$17.15
N$219: U$16.35 U$17.14
N$220: U$16.36 U$17.13
N$221: U$16.37 U$17.12
N$222: U$16.38 U$17.11
N$223: U$16.39 U$17.10
N$224: U$16.40 U$17.9
N$225: U$16.41 U$17.8
N$226: U$16.42 U$17.7
N$227: U$16.43 U$17.6
N$228: U$16.44 U$17.5
N$229: U$16.45 U$17.4
N$230: U$16.46 U$17.3
N$231: U$16.47 U$17.2
N$232: U$16.48 U$17.1
N$233: U$17.25 U$18.24
N$234: U$17.26 U$18.23
N$235: U$17.27 U$18.22
N$236: U$17.28 U$18.21
N$237: U$17.29 U$18.20
N$238: U$17.30 U$18.19
N$239: U$17.31 U$18.18
N$240: U$17.32 U$18.17
N$241: U$17.33 U$18.16
N$242: U$17.34 U$18.15
N$243: U$17.35 U$18.14
N$244: U$17.36 U$18.13
N$245: U$17.37 U$18.12
N$246: U$17.38 U$18.11
N$247: U$17.39 U$18.10
N$248: U$17.40 U$18.9
N$249: U$17.41 U$18.8
N$250: U$17.42 U$18.7
N$251: U$17.43 U$18.6
N$252: U$17.44 U$18.5
N$253: U$17.45 U$18.4
N$254: U$17.46 U$18.3
N$255: U$17.47 U$18.2
N$256: U$17.48 U$18.1
N$257: U$19.48 U$20.1
N$258: U$19.47 U$20.2
N$259: U$19.46 U$20.3
N$260: U$19.45 U$20.4
N$261: U$19.44 U$20.5
N$262: U$19.43 U$20.6
N$263: U$19.42 U$20.7
N$264: U$19.41 U$20.8
N$265: U$19.40 U$20.9
N$266: U$19.39 U$20.10
N$267: U$19.38 U$20.11
N$268: U$19.37 U$20.12
N$269: U$19.36 U$20.13
N$270: U$19.35 U$20.14
N$271: U$19.34 U$20.15
N$272: U$19.33 U$20.16
N$273: U$19.32 U$20.17
N$274: U$19.31 U$20.18
N$275: U$19.30 U$20.19
N$276: U$19.29 U$20.20
N$277: U$19.28 U$20.21
N$278: U$19.27 U$20.22
N$279: U$19.26 U$20.23
N$280: U$19.25 U$20.24
N$281: U$20.48 U$21.1
N$282: U$20.47 U$21.2
N$283: U$20.46 U$21.3
N$284: U$20.45 U$21.4
N$285: U$20.44 U$21.5
N$286: U$20.43 U$21.6
N$287: U$20.42 U$21.7
N$288: U$20.41 U$21.8
N$289: U$20.40 U$21.9
N$290: U$20.39 U$21.10
N$291: U$20.38 U$21.11
N$292: U$20.37 U$21.12
N$293: U$20.36 U$21.13
N$294: U$20.35 U$21.14
N$295: U$20.34 U$21.15
N$296: U$20.33 U$21.16
N$297: U$20.32 U$21.17
N$298: U$20.31 U$21.18
N$299: U$20.30 U$21.19
N$300: U$20.29 U$21.20
N$301: U$20.28 U$21.21
N$302: U$20.27 U$21.22
N$303: U$20.26 U$21.23
N$304: U$20.25 U$21.24
N$305: U$21.48 U$22.1
N$306: U$21.47 U$22.2
N$307: U$21.46 U$22.3
N$308: U$21.45 U$22.4
N$309: U$21.44 U$22.5
N$310: U$21.43 U$22.6
N$311: U$21.42 U$22.7
N$312: U$21.41 U$22.8
N$313: U$21.40 U$22.9
N$314: U$21.39 U$22.10
N$315: U$21.38 U$22.11
N$316: U$21.37 U$22.12
N$317: U$21.36 U$22.13
N$318: U$21.35 U$22.14
N$319: U$21.34 U$22.15
N$320: U$21.33 U$22.16
N$321: U$21.32 U$22.17
N$322: U$21.31 U$22.18
N$323: U$21.30 U$22.19
N$324: U$21.29 U$22.20
N$325: U$21.28 U$22.21
N$326: U$21.27 U$22.22
N$327: U$21.26 U$22.23
N$328: U$21.25 U$22.24
N$329: U$22.48 U$23.1
N$330: U$22.47 U$23.2
N$331: U$22.46 U$23.3
N$332: U$22.45 U$23.4
N$333: U$22.44 U$23.5
N$334: U$22.43 U$23.6
N$335: U$22.42 U$23.7
N$336: U$22.41 U$23.8
N$337: U$22.40 U$23.9
N$338: U$22.39 U$23.10
N$339: U$22.38 U$23.11
N$340: U$22.37 U$23.12
N$341: U$22.36 U$23.13
N$342: U$22.35 U$23.14
N$343: U$22.34 U$23.15
N$344: U$22.33 U$23.16
N$345: U$22.32 U$23.17
N$346: U$22.31 U$23.18
N$347: U$22.30 U$23.19
N$348: U$22.29 U$23.20
N$349: U$22.28 U$23.21
N$350: U$22.27 U$23.22
N$351: U$22.26 U$23.23
N$352: U$22.25 U$23.24
N$353: U$23.48 U$24.1
N$354: U$23.47 U$24.2
N$355: U$23.46 U$24.3
N$356: U$23.45 U$24.4
N$357: U$23.44 U$24.5
N$358: U$23.43 U$24.6
N$359: U$23.42 U$24.7
N$360: U$23.41 U$24.8
N$361: U$23.40 U$24.9
N$362: U$23.39 U$24.10
N$363: U$23.38 U$24.11
N$364: U$23.37 U$24.12
N$365: U$23.36 U$24.13
N$366: U$23.35 U$24.14
N$367: U$23.34 U$24.15
N$368: U$23.33 U$24.16
N$369: U$23.32 U$24.17
N$370: U$23.31 U$24.18
N$371: U$23.30 U$24.19
N$372: U$23.29 U$24.20
N$373: U$23.28 U$24.21
N$374: U$23.27 U$24.22
N$375: U$23.26 U$24.23
N$376: U$23.25 U$24.24
N$377: U$25.25 U$26.24
N$378: U$25.26 U$26.23
N$379: U$25.27 U$26.22
N$380: U$25.28 U$26.21
N$381: U$25.29 U$26.20
N$382: U$25.30 U$26.19
N$383: U$25.31 U$26.18
N$384: U$25.32 U$26.17
N$385: U$25.33 U$26.16
N$386: U$25.34 U$26.15
N$387: U$25.35 U$26.14
N$388: U$25.36 U$26.13
N$389: U$25.37 U$26.12
N$390: U$25.38 U$26.11
N$391: U$25.39 U$26.10
N$392: U$25.40 U$26.9
N$393: U$25.41 U$26.8
N$394: U$25.42 U$26.7
N$395: U$25.43 U$26.6
N$396: U$25.44 U$26.5
N$397: U$25.45 U$26.4
N$398: U$25.46 U$26.3
N$399: U$25.47 U$26.2
N$400: U$25.48 U$26.1
N$401: U$26.25 U$27.24
N$402: U$26.26 U$27.23
N$403: U$26.27 U$27.22
N$404: U$26.28 U$27.21
N$405: U$26.29 U$27.20
N$406: U$26.30 U$27.19
N$407: U$26.31 U$27.18
N$408: U$26.32 U$27.17
N$409: U$26.33 U$27.16
N$410: U$26.34 U$27.15
N$411: U$26.35 U$27.14
N$412: U$26.36 U$27.13
N$413: U$26.37 U$27.12
N$414: U$26.38 U$27.11
N$415: U$26.39 U$27.10
N$416: U$26.40 U$27.9
N$417: U$26.41 U$27.8
N$418: U$26.42 U$27.7
N$419: U$26.43 U$27.6
N$420: U$26.44 U$27.5
N$421: U$26.45 U$27.4
N$422: U$26.46 U$27.3
N$423: U$26.47 U$27.2
N$424: U$26.48 U$27.1
N$425: U$27.25 U$28.24
N$426: U$27.26 U$28.23
N$427: U$27.27 U$28.22
N$428: U$27.28 U$28.21
N$429: U$27.29 U$28.20
N$430: U$27.30 U$28.19
N$431: U$27.31 U$28.18
N$432: U$27.32 U$28.17
N$433: U$27.33 U$28.16
N$434: U$27.34 U$28.15
N$435: U$27.35 U$28.14
N$436: U$27.36 U$28.13
N$437: U$27.37 U$28.12
N$438: U$27.38 U$28.11
N$439: U$27.39 U$28.10
N$440: U$27.40 U$28.9
N$441: U$27.41 U$28.8
N$442: U$27.42 U$28.7
N$443: U$27.43 U$28.6
N$444: U$27.44 U$28.5
N$445: U$27.45 U$28.4
N$446: U$27.46 U$28.3
N$447: U$27.47 U$28.2
N$448: U$27.48 U$28.1
N$449: U$28.25 U$29.24
N$450: U$28.26 U$29.23
N$451: U$28.27 U$29.22
N$452: U$28.28 U$29.21
N$453: U$28.29 U$29.20
N$454: U$28.30 U$29.19
N$455: U$28.31 U$29.18
N$456: U$28.32 U$29.17
N$457: U$28.33 U$29.16
N$458: U$28.34 U$29.15
N$459: U$28.35 U$29.14
N$460: U$28.36 U$29.13
N$461: U$28.37 U$29.12
N$462: U$28.38 U$29.11
N$463: U$28.39 U$29.10
N$464: U$28.40 U$29.9
N$465: U$28.41 U$29.8
N$466: U$28.42 U$29.7
N$467: U$28.43 U$29.6
N$468: U$28.44 U$29.5
N$469: U$28.45 U$29.4
N$470: U$28.46 U$29.3
N$471: U$28.47 U$29.2
N$472: U$28.48 U$29.1
N$473: U$29.25 U$30.24
N$474: U$29.26 U$30.23
N$475: U$29.27 U$30.22
N$476: U$29.28 U$30.21
N$477: U$29.29 U$30.20
N$478: U$29.30 U$30.19
N$479: U$29.31 U$30.18
N$480: U$29.32 U$30.17
N$481: U$29.33 U$30.16
N$482: U$29.34 U$30.15
N$483: U$29.35 U$30.14
N$484: U$29.36 U$30.13
N$485: U$29.37 U$30.12
N$486: U$29.38 U$30.11
N$487: U$29.39 U$30.10
N$488: U$29.40 U$30.9
N$489: U$29.41 U$30.8
N$490: U$29.42 U$30.7
N$491: U$29.43 U$30.6
N$492: U$29.44 U$30.5
N$493: U$29.45 U$30.4
N$494: U$29.46 U$30.3
N$495: U$29.47 U$30.2
N$496: U$29.48 U$30.1
N$497: U$40.48 U$41.1
N$498: U$40.47 U$41.2
N$499: U$40.46 U$41.3
N$500: U$40.45 U$41.4
N$501: U$40.44 U$41.5
N$502: U$40.43 U$41.6
N$503: U$40.42 U$41.7
N$504: U$40.41 U$41.8
N$505: U$40.40 U$41.9
N$506: U$40.39 U$41.10
N$507: U$40.38 U$41.11
N$508: U$40.37 U$41.12
N$509: U$40.36 U$41.13
N$510: U$40.35 U$41.14
N$511: U$40.34 U$41.15
N$512: U$40.33 U$41.16
N$513: U$40.32 U$41.17
N$514: U$40.31 U$41.18
N$515: U$40.30 U$41.19
N$516: U$40.29 U$41.20
N$517: U$40.28 U$41.21
N$518: U$40.27 U$41.22
N$519: U$40.26 U$41.23
N$520: U$40.25 U$41.24
N$521: U$41.48 U$42.1
N$522: U$41.47 U$42.2
N$523: U$41.46 U$42.3
N$524: U$41.45 U$42.4
N$525: U$41.44 U$42.5
N$526: U$41.43 U$42.6
N$527: U$41.42 U$42.7
N$528: U$41.41 U$42.8
N$529: U$41.40 U$42.9
N$530: U$41.39 U$42.10
N$531: U$41.38 U$42.11
N$532: U$41.37 U$42.12
N$533: U$41.36 U$42.13
N$534: U$41.35 U$42.14
N$535: U$41.34 U$42.15
N$536: U$41.33 U$42.16
N$537: U$41.32 U$42.17
N$538: U$41.31 U$42.18
N$539: U$41.30 U$42.19
N$540: U$41.29 U$42.20
N$541: U$41.28 U$42.21
N$542: U$41.27 U$42.22
N$543: U$41.26 U$42.23
N$544: U$41.25 U$42.24
N$545: U$42.48 U$43.1
N$546: U$42.47 U$43.2
N$547: U$42.46 U$43.3
N$548: U$42.45 U$43.4
N$549: U$42.44 U$43.5
N$550: U$42.43 U$43.6
N$551: U$42.42 U$43.7
N$552: U$42.41 U$43.8
N$553: U$42.40 U$43.9
N$554: U$42.39 U$43.10
N$555: U$42.38 U$43.11
N$556: U$42.37 U$43.12
N$557: U$42.36 U$43.13
N$558: U$42.35 U$43.14
N$559: U$42.34 U$43.15
N$560: U$42.33 U$43.16
N$561: U$42.32 U$43.17
N$562: U$42.31 U$43.18
N$563: U$42.30 U$43.19
N$564: U$42.29 U$43.20
N$565: U$42.28 U$43.21
N$566: U$42.27 U$43.22
N$567: U$42.26 U$43.23
N$568: U$42.25 U$43.24
N$569: U$43.48 U$44.1
N$570: U$43.47 U$44.2
N$571: U$43.46 U$44.3
N$572: U$43.45 U$44.4
N$573: U$43.44 U$44.5
N$574: U$43.43 U$44.6
N$575: U$43.42 U$44.7
N$576: U$43.41 U$44.8
N$577: U$43.40 U$44.9
N$578: U$43.39 U$44.10
N$579: U$43.38 U$44.11
N$580: U$43.37 U$44.12
N$581: U$43.36 U$44.13
N$582: U$43.35 U$44.14
N$583: U$43.34 U$44.15
N$584: U$43.33 U$44.16
N$585: U$43.32 U$44.17
N$586: U$43.31 U$44.18
N$587: U$43.30 U$44.19
N$588: U$43.29 U$44.20
N$589: U$43.28 U$44.21
N$590: U$43.27 U$44.22
N$591: U$43.26 U$44.23
N$592: U$43.25 U$44.24
N$593: U$44.48 U$45.1
N$594: U$44.47 U$45.2
N$595: U$44.46 U$45.3
N$596: U$44.45 U$45.4
N$597: U$44.44 U$45.5
N$598: U$44.43 U$45.6
N$599: U$44.42 U$45.7
N$600: U$44.41 U$45.8
N$601: U$44.40 U$45.9
N$602: U$44.39 U$45.10
N$603: U$44.38 U$45.11
N$604: U$44.37 U$45.12
N$605: U$44.36 U$45.13
N$606: U$44.35 U$45.14
N$607: U$44.34 U$45.15
N$608: U$44.33 U$45.16
N$609: U$44.32 U$45.17
N$610: U$44.31 U$45.18
N$611: U$44.30 U$45.19
N$612: U$44.29 U$45.20
N$613: U$44.28 U$45.21
N$614: U$44.27 U$45.22
N$615: U$44.26 U$45.23
N$616: U$44.25 U$45.24
N$617: U$46.25 U$47.24
N$618: U$46.26 U$47.23
N$619: U$46.27 U$47.22
N$620: U$46.28 U$47.21
N$621: U$46.29 U$47.20
N$622: U$46.30 U$47.19
N$623: U$46.31 U$47.18
N$624: U$46.32 U$47.17
N$625: U$46.33 U$47.16
N$626: U$46.34 U$47.15
N$627: U$46.35 U$47.14
N$628: U$46.36 U$47.13
N$629: U$46.37 U$47.12
N$630: U$46.38 U$47.11
N$631: U$46.39 U$47.10
N$632: U$46.40 U$47.9
N$633: U$46.41 U$47.8
N$634: U$46.42 U$47.7
N$635: U$46.43 U$47.6
N$636: U$46.44 U$47.5
N$637: U$46.45 U$47.4
N$638: U$46.46 U$47.3
N$639: U$46.47 U$47.2
N$640: U$46.48 U$47.1
N$641: U$47.25 U$48.24
N$642: U$47.26 U$48.23
N$643: U$47.27 U$48.22
N$644: U$47.28 U$48.21
N$645: U$47.29 U$48.20
N$646: U$47.30 U$48.19
N$647: U$47.31 U$48.18
N$648: U$47.32 U$48.17
N$649: U$47.33 U$48.16
N$650: U$47.34 U$48.15
N$651: U$47.35 U$48.14
N$652: U$47.36 U$48.13
N$653: U$47.37 U$48.12
N$654: U$47.38 U$48.11
N$655: U$47.39 U$48.10
N$656: U$47.40 U$48.9
N$657: U$47.41 U$48.8
N$658: U$47.42 U$48.7
N$659: U$47.43 U$48.6
N$660: U$47.44 U$48.5
N$661: U$47.45 U$48.4
N$662: U$47.46 U$48.3
N$663: U$47.47 U$48.2
N$664: U$47.48 U$48.1
N$665: U$48.25 U$49.24
N$666: U$48.26 U$49.23
N$667: U$48.27 U$49.22
N$668: U$48.28 U$49.21
N$669: U$48.29 U$49.20
N$670: U$48.30 U$49.19
N$671: U$48.31 U$49.18
N$672: U$48.32 U$49.17
N$673: U$48.33 U$49.16
N$674: U$48.34 U$49.15
N$675: U$48.35 U$49.14
N$676: U$48.36 U$49.13
N$677: U$48.37 U$49.12
N$678: U$48.38 U$49.11
N$679: U$48.39 U$49.10
N$680: U$48.40 U$49.9
N$681: U$48.41 U$49.8
N$682: U$48.42 U$49.7
N$683: U$48.43 U$49.6
N$684: U$48.44 U$49.5
N$685: U$48.45 U$49.4
N$686: U$48.46 U$49.3
N$687: U$48.47 U$49.2
N$688: U$48.48 U$49.1
N$689: U$49.25 U$50.24
N$690: U$49.26 U$50.23
N$691: U$49.27 U$50.22
N$692: U$49.28 U$50.21
N$693: U$49.29 U$50.20
N$694: U$49.30 U$50.19
N$695: U$49.31 U$50.18
N$696: U$49.32 U$50.17
N$697: U$49.33 U$50.16
N$698: U$49.34 U$50.15
N$699: U$49.35 U$50.14
N$700: U$49.36 U$50.13
N$701: U$49.37 U$50.12
N$702: U$49.38 U$50.11
N$703: U$49.39 U$50.10
N$704: U$49.40 U$50.9
N$705: U$49.41 U$50.8
N$706: U$49.42 U$50.7
N$707: U$49.43 U$50.6
N$708: U$49.44 U$50.5
N$709: U$49.45 U$50.4
N$710: U$49.46 U$50.3
N$711: U$49.47 U$50.2
N$712: U$49.48 U$50.1
N$713: U$50.25 U$51.24
N$714: U$50.26 U$51.23
N$715: U$50.27 U$51.22
N$716: U$50.28 U$51.21
N$717: U$50.29 U$51.20
N$718: U$50.30 U$51.19
N$719: U$50.31 U$51.18
N$720: U$50.32 U$51.17
N$721: U$50.33 U$51.16
N$722: U$50.34 U$51.15
N$723: U$50.35 U$51.14
N$724: U$50.36 U$51.13
N$725: U$50.37 U$51.12
N$726: U$50.38 U$51.11
N$727: U$50.39 U$51.10
N$728: U$50.40 U$51.9
N$729: U$50.41 U$51.8
N$730: U$50.42 U$51.7
N$731: U$50.43 U$51.6
N$732: U$50.44 U$51.5
N$733: U$50.45 U$51.4
N$734: U$50.46 U$51.3
N$735: U$50.47 U$51.2
N$736: U$50.48 U$51.1
N$737: U$52.48 U$53.1
N$738: U$52.47 U$53.2
N$739: U$52.46 U$53.3
N$740: U$52.45 U$53.4
N$741: U$52.44 U$53.5
N$742: U$52.43 U$53.6
N$743: U$52.42 U$53.7
N$744: U$52.41 U$53.8
N$745: U$52.40 U$53.9
N$746: U$52.39 U$53.10
N$747: U$52.38 U$53.11
N$748: U$52.37 U$53.12
N$749: U$52.36 U$53.13
N$750: U$52.35 U$53.14
N$751: U$52.34 U$53.15
N$752: U$52.33 U$53.16
N$753: U$52.32 U$53.17
N$754: U$52.31 U$53.18
N$755: U$52.30 U$53.19
N$756: U$52.29 U$53.20
N$757: U$52.28 U$53.21
N$758: U$52.27 U$53.22
N$759: U$52.26 U$53.23
N$760: U$52.25 U$53.24
N$761: U$53.48 U$54.1
N$762: U$53.47 U$54.2
N$763: U$53.46 U$54.3
N$764: U$53.45 U$54.4
N$765: U$53.44 U$54.5
N$766: U$53.43 U$54.6
N$767: U$53.42 U$54.7
N$768: U$53.41 U$54.8
N$769: U$53.40 U$54.9
N$770: U$53.39 U$54.10
N$771: U$53.38 U$54.11
N$772: U$53.37 U$54.12
N$773: U$53.36 U$54.13
N$774: U$53.35 U$54.14
N$775: U$53.34 U$54.15
N$776: U$53.33 U$54.16
N$777: U$53.32 U$54.17
N$778: U$53.31 U$54.18
N$779: U$53.30 U$54.19
N$780: U$53.29 U$54.20
N$781: U$53.28 U$54.21
N$782: U$53.27 U$54.22
N$783: U$53.26 U$54.23
N$784: U$53.25 U$54.24
N$785: U$54.48 U$55.1
N$786: U$54.47 U$55.2
N$787: U$54.46 U$55.3
N$788: U$54.45 U$55.4
N$789: U$54.44 U$55.5
N$790: U$54.43 U$55.6
N$791: U$54.42 U$55.7
N$792: U$54.41 U$55.8
N$793: U$54.40 U$55.9
N$794: U$54.39 U$55.10
N$795: U$54.38 U$55.11
N$796: U$54.37 U$55.12
N$797: U$54.36 U$55.13
N$798: U$54.35 U$55.14
N$799: U$54.34 U$55.15
N$800: U$54.33 U$55.16
N$801: U$54.32 U$55.17
N$802: U$54.31 U$55.18
N$803: U$54.30 U$55.19
N$804: U$54.29 U$55.20
N$805: U$54.28 U$55.21
N$806: U$54.27 U$55.22
N$807: U$54.26 U$55.23
N$808: U$54.25 U$55.24
N$809: U$55.48 U$56.1
N$810: U$55.47 U$56.2
N$811: U$55.46 U$56.3
N$812: U$55.45 U$56.4
N$813: U$55.44 U$56.5
N$814: U$55.43 U$56.6
N$815: U$55.42 U$56.7
N$816: U$55.41 U$56.8
N$817: U$55.40 U$56.9
N$818: U$55.39 U$56.10
N$819: U$55.38 U$56.11
N$820: U$55.37 U$56.12
N$821: U$55.36 U$56.13
N$822: U$55.35 U$56.14
N$823: U$55.34 U$56.15
N$824: U$55.33 U$56.16
N$825: U$55.32 U$56.17
N$826: U$55.31 U$56.18
N$827: U$55.30 U$56.19
N$828: U$55.29 U$56.20
N$829: U$55.28 U$56.21
N$830: U$55.27 U$56.22
N$831: U$55.26 U$56.23
N$832: U$55.25 U$56.24
N$833: U$56.48 U$57.1
N$834: U$56.47 U$57.2
N$835: U$56.46 U$57.3
N$836: U$56.45 U$57.4
N$837: U$56.44 U$57.5
N$838: U$56.43 U$57.6
N$839: U$56.42 U$57.7
N$840: U$56.41 U$57.8
N$841: U$56.40 U$57.9
N$842: U$56.39 U$57.10
N$843: U$56.38 U$57.11
N$844: U$56.37 U$57.12
N$845: U$56.36 U$57.13
N$846: U$56.35 U$57.14
N$847: U$56.34 U$57.15
N$848: U$56.33 U$57.16
N$849: U$56.32 U$57.17
N$850: U$56.31 U$57.18
N$851: U$56.30 U$57.19
N$852: U$56.29 U$57.20
N$853: U$56.28 U$57.21
N$854: U$56.27 U$57.22
N$855: U$56.26 U$57.23
N$856: U$56.25 U$57.24
N$857: U$58.25 U$59.24
N$858: U$58.26 U$59.23
N$859: U$58.27 U$59.22
N$860: U$58.28 U$59.21
N$861: U$58.29 U$59.20
N$862: U$58.30 U$59.19
N$863: U$58.31 U$59.18
N$864: U$58.32 U$59.17
N$865: U$58.33 U$59.16
N$866: U$58.34 U$59.15
N$867: U$58.35 U$59.14
N$868: U$58.36 U$59.13
N$869: U$58.37 U$59.12
N$870: U$58.38 U$59.11
N$871: U$58.39 U$59.10
N$872: U$58.40 U$59.9
N$873: U$58.41 U$59.8
N$874: U$58.42 U$59.7
N$875: U$58.43 U$59.6
N$876: U$58.44 U$59.5
N$877: U$58.45 U$59.4
N$878: U$58.46 U$59.3
N$879: U$58.47 U$59.2
N$880: U$58.48 U$59.1
N$881: U$59.25 U$60.24
N$882: U$59.26 U$60.23
N$883: U$59.27 U$60.22
N$884: U$59.28 U$60.21
N$885: U$59.29 U$60.20
N$886: U$59.30 U$60.19
N$887: U$59.31 U$60.18
N$888: U$59.32 U$60.17
N$889: U$59.33 U$60.16
N$890: U$59.34 U$60.15
N$891: U$59.35 U$60.14
N$892: U$59.36 U$60.13
N$893: U$59.37 U$60.12
N$894: U$59.38 U$60.11
N$895: U$59.39 U$60.10
N$896: U$59.40 U$60.9
N$897: U$59.41 U$60.8
N$898: U$59.42 U$60.7
N$899: U$59.43 U$60.6
N$900: U$59.44 U$60.5
N$901: U$59.45 U$60.4
N$902: U$59.46 U$60.3
N$903: U$59.47 U$60.2
N$904: U$59.48 U$60.1
N$905: U$60.25 U$61.24
N$906: U$60.26 U$61.23
N$907: U$60.27 U$61.22
N$908: U$60.28 U$61.21
N$909: U$60.29 U$61.20
N$910: U$60.30 U$61.19
N$911: U$60.31 U$61.18
N$912: U$60.32 U$61.17
N$913: U$60.33 U$61.16
N$914: U$60.34 U$61.15
N$915: U$60.35 U$61.14
N$916: U$60.36 U$61.13
N$917: U$60.37 U$61.12
N$918: U$60.38 U$61.11
N$919: U$60.39 U$61.10
N$920: U$60.40 U$61.9
N$921: U$60.41 U$61.8
N$922: U$60.42 U$61.7
N$923: U$60.43 U$61.6
N$924: U$60.44 U$61.5
N$925: U$60.45 U$61.4
N$926: U$60.46 U$61.3
N$927: U$60.47 U$61.2
N$928: U$60.48 U$61.1
N$929: U$61.25 U$62.24
N$930: U$61.26 U$62.23
N$931: U$61.27 U$62.22
N$932: U$61.28 U$62.21
N$933: U$61.29 U$62.20
N$934: U$61.30 U$62.19
N$935: U$61.31 U$62.18
N$936: U$61.32 U$62.17
N$937: U$61.33 U$62.16
N$938: U$61.34 U$62.15
N$939: U$61.35 U$62.14
N$940: U$61.36 U$62.13
N$941: U$61.37 U$62.12
N$942: U$61.38 U$62.11
N$943: U$61.39 U$62.10
N$944: U$61.40 U$62.9
N$945: U$61.41 U$62.8
N$946: U$61.42 U$62.7
N$947: U$61.43 U$62.6
N$948: U$61.44 U$62.5
N$949: U$61.45 U$62.4
N$950: U$61.46 U$62.3
N$951: U$61.47 U$62.2
N$952: U$61.48 U$62.1
N$953: U$62.25 U$63.24
N$954: U$62.26 U$63.23
N$955: U$62.27 U$63.22
N$956: U$62.28 U$63.21
N$957: U$62.29 U$63.20
N$958: U$62.30 U$63.19
N$959: U$62.31 U$63.18
N$960: U$62.32 U$63.17
N$961: U$62.33 U$63.16
N$962: U$62.34 U$63.15
N$963: U$62.35 U$63.14
N$964: U$62.36 U$63.13
N$965: U$62.37 U$63.12
N$966: U$62.38 U$63.11
N$967: U$62.39 U$63.10
N$968: U$62.40 U$63.9
N$969: U$62.41 U$63.8
N$970: U$62.42 U$63.7
N$971: U$62.43 U$63.6
N$972: U$62.44 U$63.5
N$973: U$62.45 U$63.4
N$974: U$62.46 U$63.3
N$975: U$62.47 U$63.2
N$976: U$62.48 U$63.1
N$978: R14.1 U$7.A0 U$8.WDI
N$979: BMS-OK.A IC4.6 IC4.7
N$980: BMS-OK.C R15.1
N$981: ON-LED.C R16.1
N$982: U$73.1 U$75.D3(CANTX)
N$983: R30.2 U$73.8
N$984: C9.2 R28.1
N$985: C10.2 R29.1
N$986: R31.1 TEENSY.C
N$987: R33.1 U$74.16
N$988: R33.2 R34.1 U$74.15
N$989: C11.1 U$77.P$11
N$990: U$73.4 U$75.D4(CANRX)
N$991: TEENSY.A U$75.D7(RX3)
N$992: R38.2 U$76.WDO U$78.2
N$993: U$75.A1 U$78.1
N$994: R42.1 U$75.A0 U$76.WDI
N$997: BMS-OK2.A IC6.6 IC6.7
N$998: BMS-OK2.C R17.1
N$999: ON-LED2.C R18.1
N$1000: U$79.1 U$81.D3(CANTX)
N$1001: R22.2 U$79.8
N$1002: C14.2 R20.1
N$1003: C17.2 R21.1
N$1004: R23.1 TEENSY2.C
N$1005: R24.1 U$80.16
N$1006: R24.2 R25.1 U$80.15
N$1007: C18.1 U$83.P$11
N$1008: U$79.4 U$81.D4(CANRX)
N$1009: TEENSY2.A U$81.D7(RX3)
N$1010: R41.2 U$82.WDO U$84.2
N$1011: U$81.A1 U$84.1
N$1012: R44.1 U$81.A0 U$82.WDI
N$1014: Q1.3 X3.2
N$1015: LED1.A R49.1
N$1016: LED2.A R50.2
N$1017: R51.2 U$87.1
N$1018: R50.1 U$85.D8(TX3)
N$1019: R49.2 U$85.D11
N$1020: J1.1 R46.2
N$1021: U$87.3 X4.1
N$1022: U$88.S2 X2.2
N$1023: U$88.S1 X2.1
N$1032: U$92.S2 X9.2
N$1033: U$92.S1 X9.1
N$1034: BMS-OK3.A IC8.6 IC8.7
N$1035: BMS-OK3.C R58.1
N$1036: ON-LED3.C R59.1
N$1037: U$93.1 U$95.D3(CANTX)
N$1038: R63.2 U$93.8
N$1039: C27.2 R61.1
N$1040: C28.2 R62.1
N$1041: R64.1 TEENSY3.C
N$1042: R65.1 U$94.16
N$1043: R65.2 R66.1 U$94.15
N$1044: C29.1 U$97.P$11
N$1045: U$93.4 U$95.D4(CANRX)
N$1046: TEENSY3.A U$95.D7(RX3)
N$1047: R69.2 U$96.WDO U$98.2
N$1048: U$95.A1 U$98.1
N$1049: R71.1 U$95.A0 U$96.WDI
N$1050: Q3.3 X12.2
N$1051: LED4.A R74.1
N$1052: LED5.A R75.2
N$1053: R76.2 U$101.1
N$1054: R75.1 U$99.D8(TX3)
N$1055: R74.2 U$99.D11
N$1056: J3.1 R45.2
N$1057: U$101.3 X13.1
SCK_TEENSY: U$74.4 U$75.D13
SCK_TEENSY1: U$3.4 U$7.D13
SCK_TEENSY2: U$80.4 U$81.D13
SCK_TEENSY3: U$94.4 U$95.D13
SIGNAL_SAFE1: Q1.1 R47.1 R48.2 U$85.A0
SIGNAL_SAFE2: Q3.1 R72.1 R73.2 U$99.A0

## Tracks (layer width: path | path; a pad name or v marks a point on that pad's centre or on a via)
5V  (1 unrouted)
5V1  (1 unrouted)
5V2  (via drill 0.35)
  Top 0.61: CAN_T2.3 150.38,22.23 U$100.3 144.18,25.4 v143.76,25.4 | C34.1 U$99.VIN
  Bottom 0.61: U$99.VIN 160.27,26.67 145.03,26.67 v143.76,25.4 143.76,19.26 X12.1
5V3  (1 unrouted)
5V4  (via drill 0.35)
  Top 0.61: CAN_T1.3 150.38,64.9 U$86.3 144.18,68.07 v143.76,68.07 | C23.1 U$85.VIN
  Bottom 0.61: U$85.VIN 160.27,69.34 145.03,69.34 v143.76,68.07 143.76,61.93 X3.1
12V1
  Top 0.61: X5.1 135.04,100.31 D2.C 143.31,95.75 U$88.C1
12V2
  Top 0.61: X1.P$1 141.02,74.18 U$86.1 145.69,75.45 146.75,76.51 | 146.75,76.51 147.2,76.96 C22.1 | U$87.4 146.29,76.51 146.75,76.51
12V3
  Top 0.61: X10.1 135.04,135.62 D1.C 143.31,131.06 U$92.C1
12V4
  Top 0.61: X11.P$1 141.02,31.51 U$100.1 145.69,32.78 146.75,33.84 | 146.75,33.84 147.2,34.29 C33.1 | U$101.4 146.29,33.84 146.75,33.84
+3V1  (via drill 0.35)
  Top 0.254: C6.2 11.81,61.35 v11.81,60.07
  Top 0.305: U$7.3.3V 15.11,70.23 11.81,66.93 v11.81,60.07 11.81,54.78 v11.76,54.74 | v8.13,46.23 8.13,46.74 v9.91,48.51
  Bottom 0.305: U$3.6 11.54,59.8 v11.81,60.07 | v11.76,54.74 11.76,48.96 U$10.5 10.23,48.19 v9.91,48.51 | R11.1 8.13,45.48 v8.13,46.23
+3V2  (via drill 0.35)
  Top 0.254: C20.2 11.81,140.6 v11.81,139.32
  Top 0.305: U$81.3.3V 17.53,149.61 14.86,149.61 11.81,146.56 v11.81,139.32 11.81,134.03 v11.76,133.99
  Bottom 0.305: U$80.6 11.54,139.05 v11.81,139.32 | U$84.5 11.76,128.21 v11.76,133.99
+3V3  (via drill 0.35)
  Top 0.254: C15.2 11.81,100.97 v11.81,99.69
  Top 0.305: U$75.3.3V 17.53,109.98 14.86,109.98 11.81,106.93 v11.81,99.69 11.81,94.41 v11.76,94.36
  Bottom 0.305: U$74.6 11.54,99.43 v11.81,99.69 | U$78.5 11.76,88.59 v11.76,94.36
+3V4  (via drill 0.35)
  Top 0.254: C31.2 11.81,21.73 v11.81,20.45
  Top 0.305: U$95.3.3V 15.11,30.61 11.81,27.3 v11.81,20.45 11.81,15.16 v11.76,15.11 | v8.13,6.6 8.13,7.11 v9.91,8.89
  Bottom 0.305: U$94.6 11.54,20.18 v11.81,20.45 | v11.76,15.11 11.76,9.34 U$98.5 10.23,8.57 v9.91,8.89 | R68.1 8.13,5.85 v8.13,6.6
+5V  (via drill 0.35)
  Top 0.254: C16.2 10.54,105.03
  Top 0.61: v27.18,114.43 28.68,112.93 IC3.3 | U$75.VIN 13.72,114.94 v8.64,109.86 10.54,107.95 10.54,105.03 v10.54,101.6 | v20.32,92.71 21.75,92.71 ON-LED.A | R38.1 21.07,84.45 v20.32,84.45 | v15.88,85.72 13.34,83.19 v12.02,83.19
  Bottom 0.305: v10.54,101.6 9.91,100.97 U$74.8 9.91,100.33 | U$74.7 9.91,100.33 | U$74.9 12.7,100.43 | 12.7,100.43 10.01,100.43 9.91,100.33 | U$74.12 13.21,98.93 | 12.7,100.43 12.7,99.44 13.21,98.93 | 13.21,98.93 11.21,96.93 U$74.1 9.91,95.19 IC4.8 7.49,94.49 6.48,93.47 6.48,84.72 R36.1 | R37.1 8.91,84.35 10.41,84.35 U$76.VCC 11.58,83.19 v12.02,83.19
  Bottom 0.61: C8.1 28.92,110.9 28.93,110.9 IC3.3 | U$75.VIN 17.79,115.07 26.53,115.07 v27.18,114.43 | v8.64,109.86 6.48,109.86 5.46,108.84 5.46,107.57 5.97,107.06 U$73.3 | R37.1 R36.1 | v20.32,92.71 19.69,92.08 19.69,86.36 19.05,85.72 | 19.05,85.72 v15.88,85.72 | v20.32,84.45 19.05,85.72
+5V1  (via drill 0.35)
  Top 0.254: C7.2 10.54,65.41
  Top 0.61: v27.18,74.8 28.68,73.3 IC1.3 | U$7.VIN 13.72,75.31 v8.64,70.23 10.54,68.33 10.54,65.41 | v10.92,62.1 10.92,65.27 C7.2 | v20.32,53.09 21.75,53.09 ON-LED1.A | R12.1 21.07,44.83 v20.32,44.83 | v15.88,46.1 13.34,43.56 v12.02,43.56
  Bottom 0.254: 12.7,60.8 12.22,60.8 v10.92,62.1
  Bottom 0.305: U$3.9 12.7,60.8 12.7,59.82 13.21,59.3 | U$3.12 13.21,59.3 | 13.21,59.3 11.21,57.3 U$3.1 9.91,55.57 IC2.8 8.26,54.86 7.24,53.85 7.24,48.51 11.05,44.7 U$8.VCC 11.58,43.56 v12.02,43.56
  Bottom 0.61: C1.1 28.92,71.27 28.93,71.27 IC1.3 | U$7.VIN 17.79,75.45 26.53,75.45 v27.18,74.8 | v8.64,70.23 6.48,70.23 5.46,69.22 5.46,67.94 5.97,67.44 U$2.3 | v20.32,53.09 19.69,52.45 19.69,46.74 19.05,46.1 | 19.05,46.1 v15.88,46.1 | v20.32,44.83 19.05,46.1
+5V2  (via drill 0.35)
  Top 0.254: C21.2 10.54,144.65
  Top 0.61: v27.18,154.05 28.68,152.55 IC5.3 | U$81.VIN 13.72,154.56 v8.64,149.48 10.54,147.57 10.54,144.65 v10.54,141.22 | v20.32,132.33 21.75,132.33 ON-LED2.A | R41.1 21.07,124.08 v20.32,124.08 | v15.88,125.35 13.34,122.81 v12.02,122.81
  Bottom 0.305: v10.54,141.22 9.91,140.6 U$80.8 9.91,139.95 | U$80.7 9.91,139.95 | U$80.9 12.7,140.05 | 12.7,140.05 10.01,140.05 9.91,139.95 | U$80.12 13.21,138.55 | 12.7,140.05 12.7,139.06 13.21,138.55 | 13.21,138.55 11.21,136.55 U$80.1 9.91,134.81 IC6.8 7.49,134.11 6.48,133.1 6.48,124.34 R32.1 | R39.1 8.91,123.98 10.41,123.98 U$82.VCC 11.58,122.81 v12.02,122.81
  Bottom 0.61: C13.1 28.92,150.52 28.93,150.52 IC5.3 | U$81.VIN 17.79,154.69 26.53,154.69 v27.18,154.05 | v8.64,149.48 6.48,149.48 5.46,148.46 5.46,147.19 5.97,146.69 U$79.3 | R39.1 R32.1 | v20.32,132.33 19.69,131.7 19.69,125.98 19.05,125.35 | 19.05,125.35 v15.88,125.35 | v20.32,124.08 19.05,125.35
+5V3  (via drill 0.35)
  Top 0.254: C32.2 10.54,25.78
  Top 0.61: v27.18,35.18 28.68,33.68 IC7.3 | U$95.VIN 13.72,35.69 v8.64,30.61 10.54,28.7 10.54,25.78 | v10.92,22.48 10.92,25.64 C32.2 | v20.32,13.46 21.75,13.46 ON-LED3.A | R69.1 21.07,5.21 v20.32,5.21 | v15.88,6.48 13.34,3.94 v12.02,3.94
  Bottom 0.254: 12.7,21.18 12.22,21.18 v10.92,22.48
  Bottom 0.305: U$94.9 12.7,21.18 12.7,20.19 13.21,19.68 | U$94.12 13.21,19.68 | 13.21,19.68 11.21,17.68 U$94.1 9.91,15.94 IC8.8 8.26,15.24 7.24,14.22 7.24,8.89 11.05,5.08 U$96.VCC 11.58,3.94 v12.02,3.94
  Bottom 0.61: C26.1 28.92,31.65 28.93,31.65 IC7.3 | U$95.VIN 17.79,35.82 26.53,35.82 v27.18,35.18 | v8.64,30.61 6.48,30.61 5.46,29.59 5.46,28.32 5.97,27.81 U$93.3 | v20.32,13.46 19.69,12.83 19.69,7.11 19.05,6.48 | 19.05,6.48 v15.88,6.48 | v20.32,5.21 19.05,6.48
+12V
  Bottom 0.61: C12.1 35.67,112.56 IC3.1 34.27,114.71 29.46,114.71 26.52,111.76 POWER.P$1
+12V1
  Bottom 0.61: C5.1 35.67,72.93 IC1.1 34.27,75.08 29.46,75.08 26.52,72.14 POWER1.P$1
+12V2
  Bottom 0.61: C19.1 35.67,152.18 IC5.1 34.27,154.33 29.46,154.33 26.52,151.38 POWER2.P$1
+12V3